# Altium PCB Stove_Light.PcbDoc
Units mm, origin at the board's own origin, x right, y up, seen from the top; angles counter-clockwise.
Board outline 65 x 65 mm, 4 copper layers (Top Signal Layer, Power Layer, Ground Layer, Bottom Signal Layer), stack 0.778 mm thick; 99 components, 64 nets, 316 pads, 223 vias.
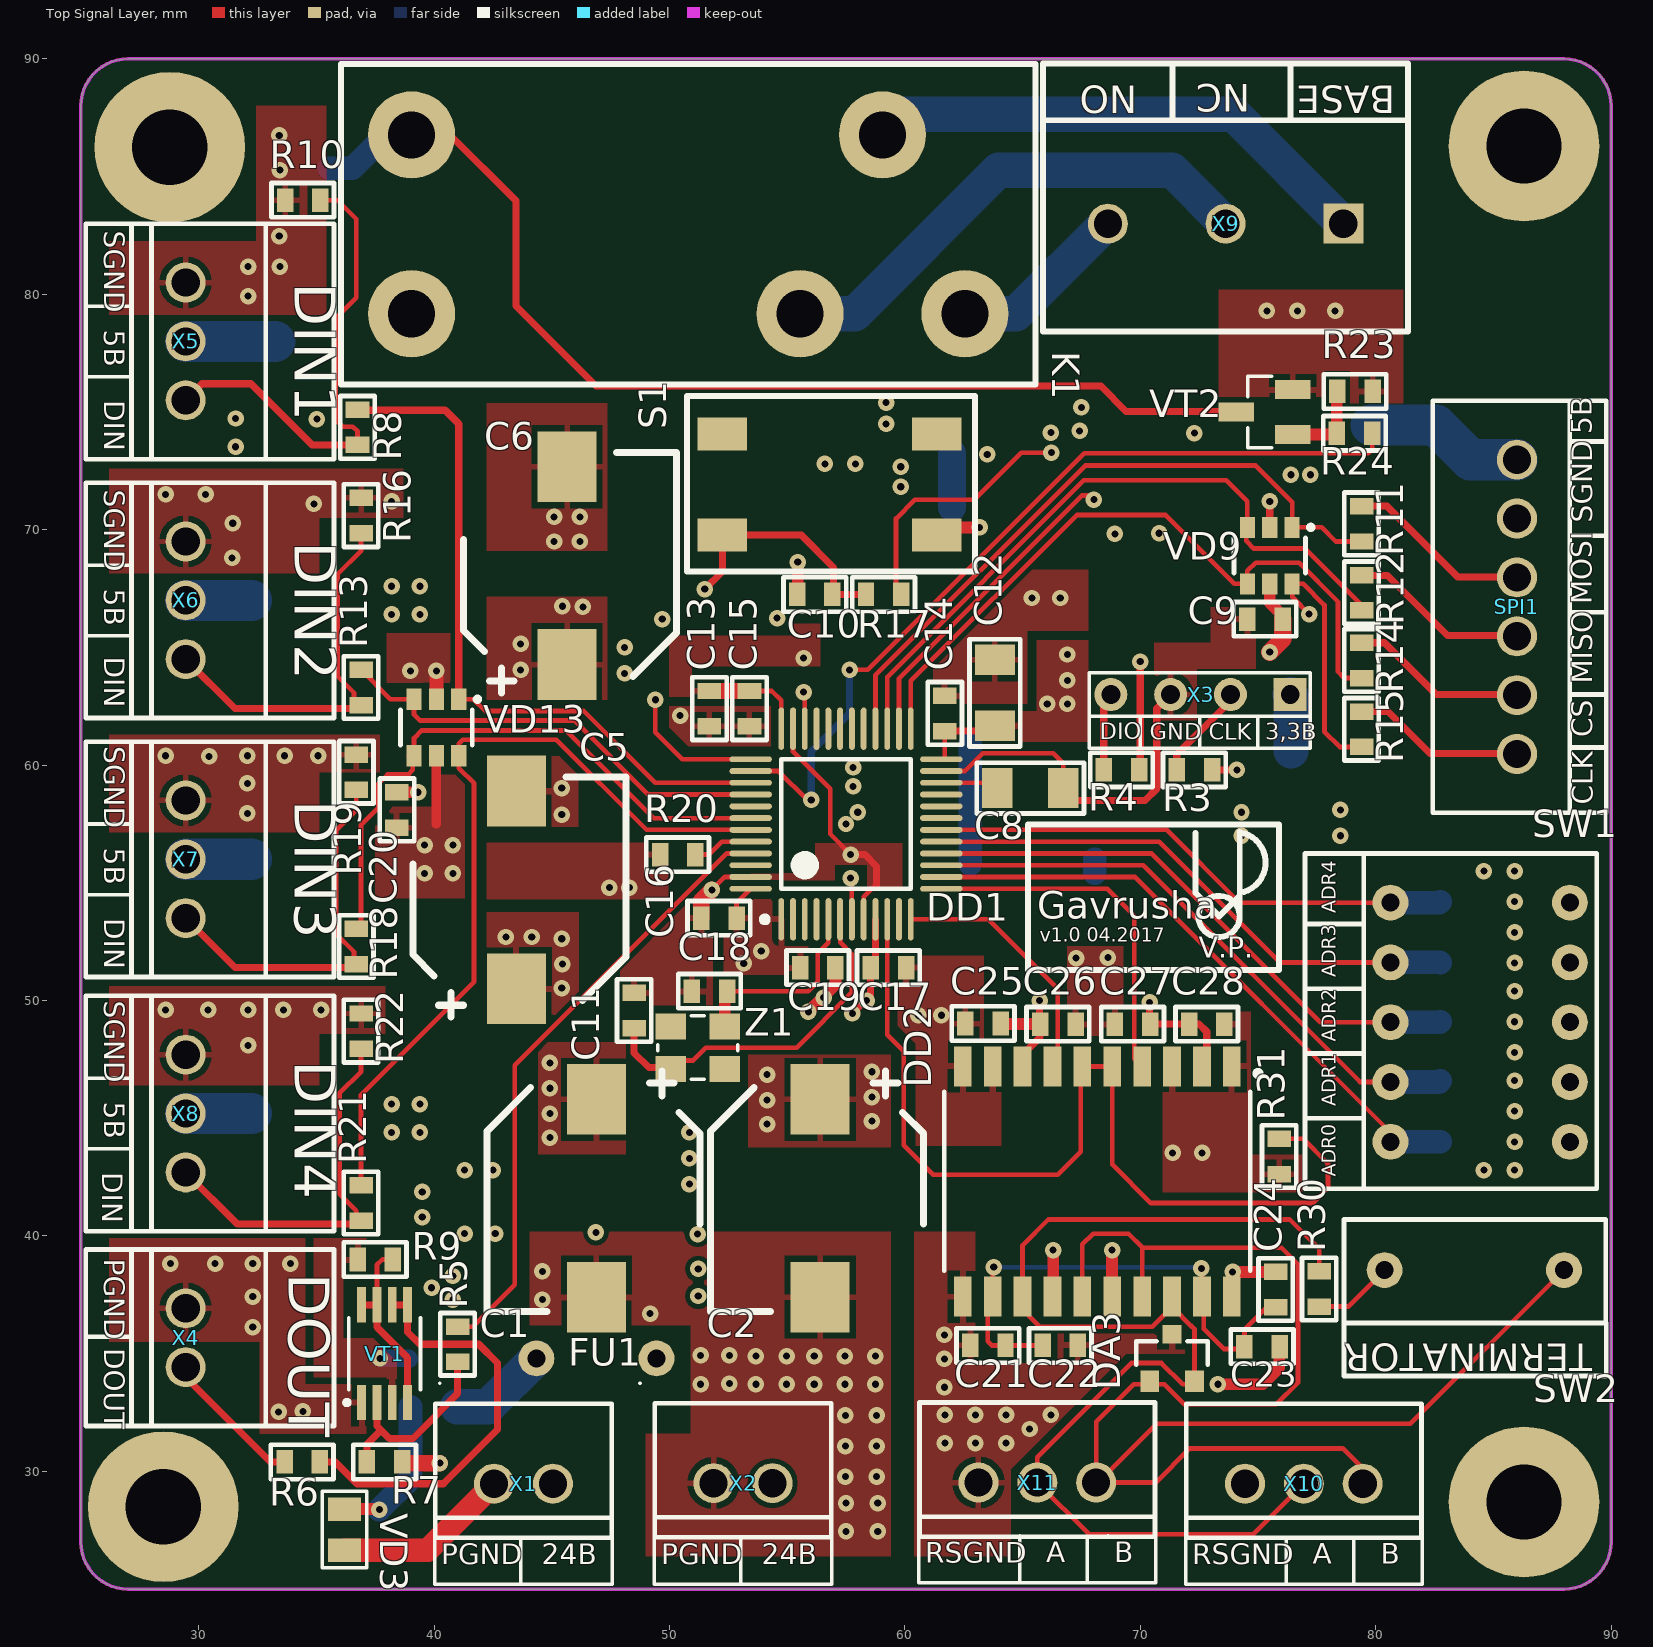
[diagram p0: Top Signal Layer view]
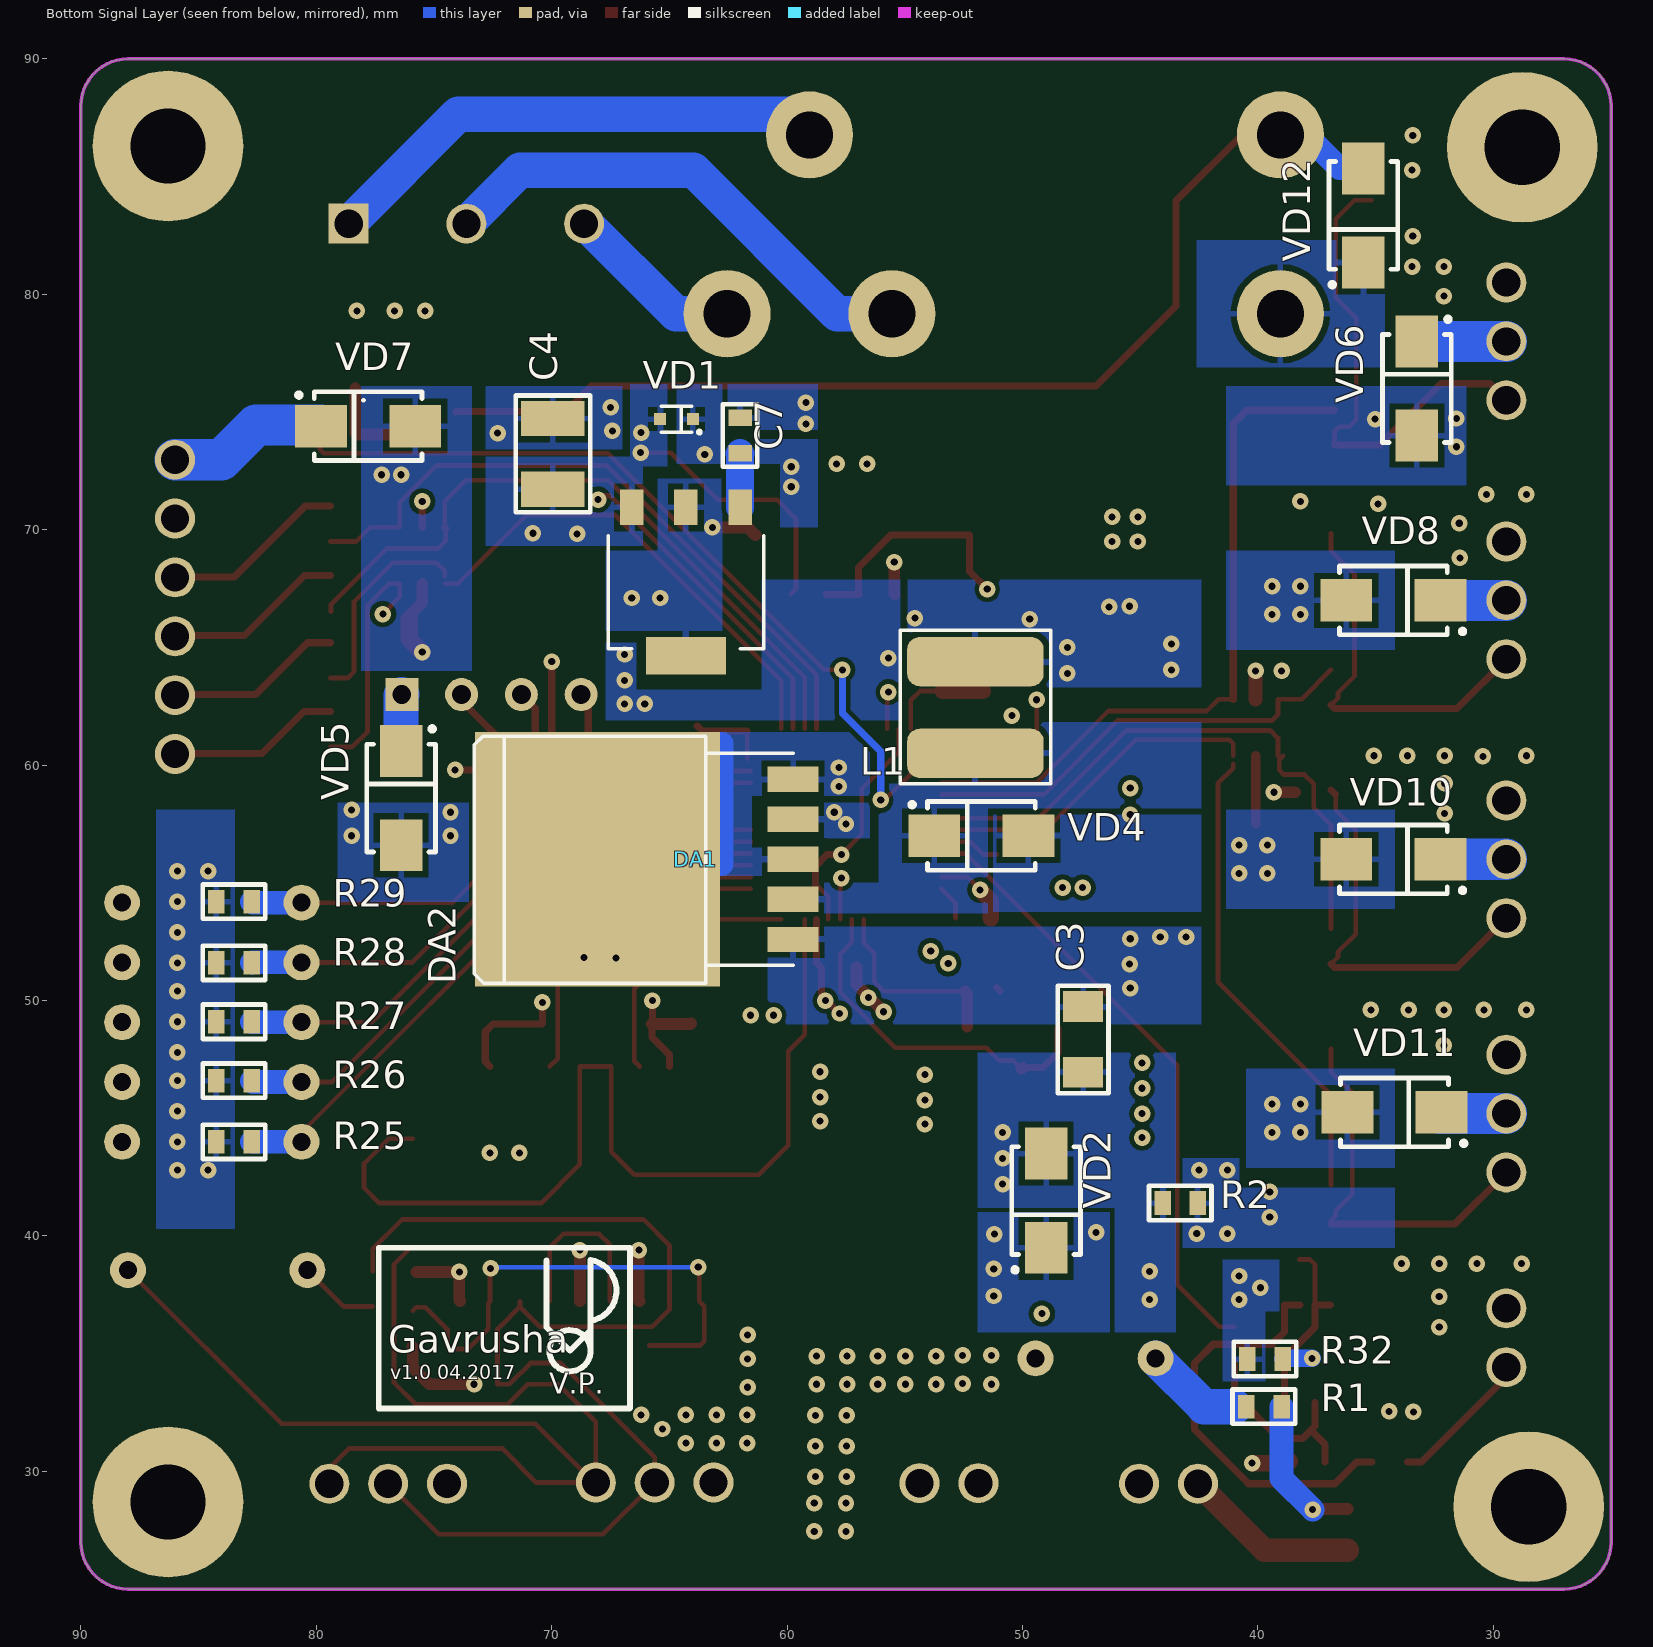
[diagram p1: Bottom Signal Layer view, seen from below]
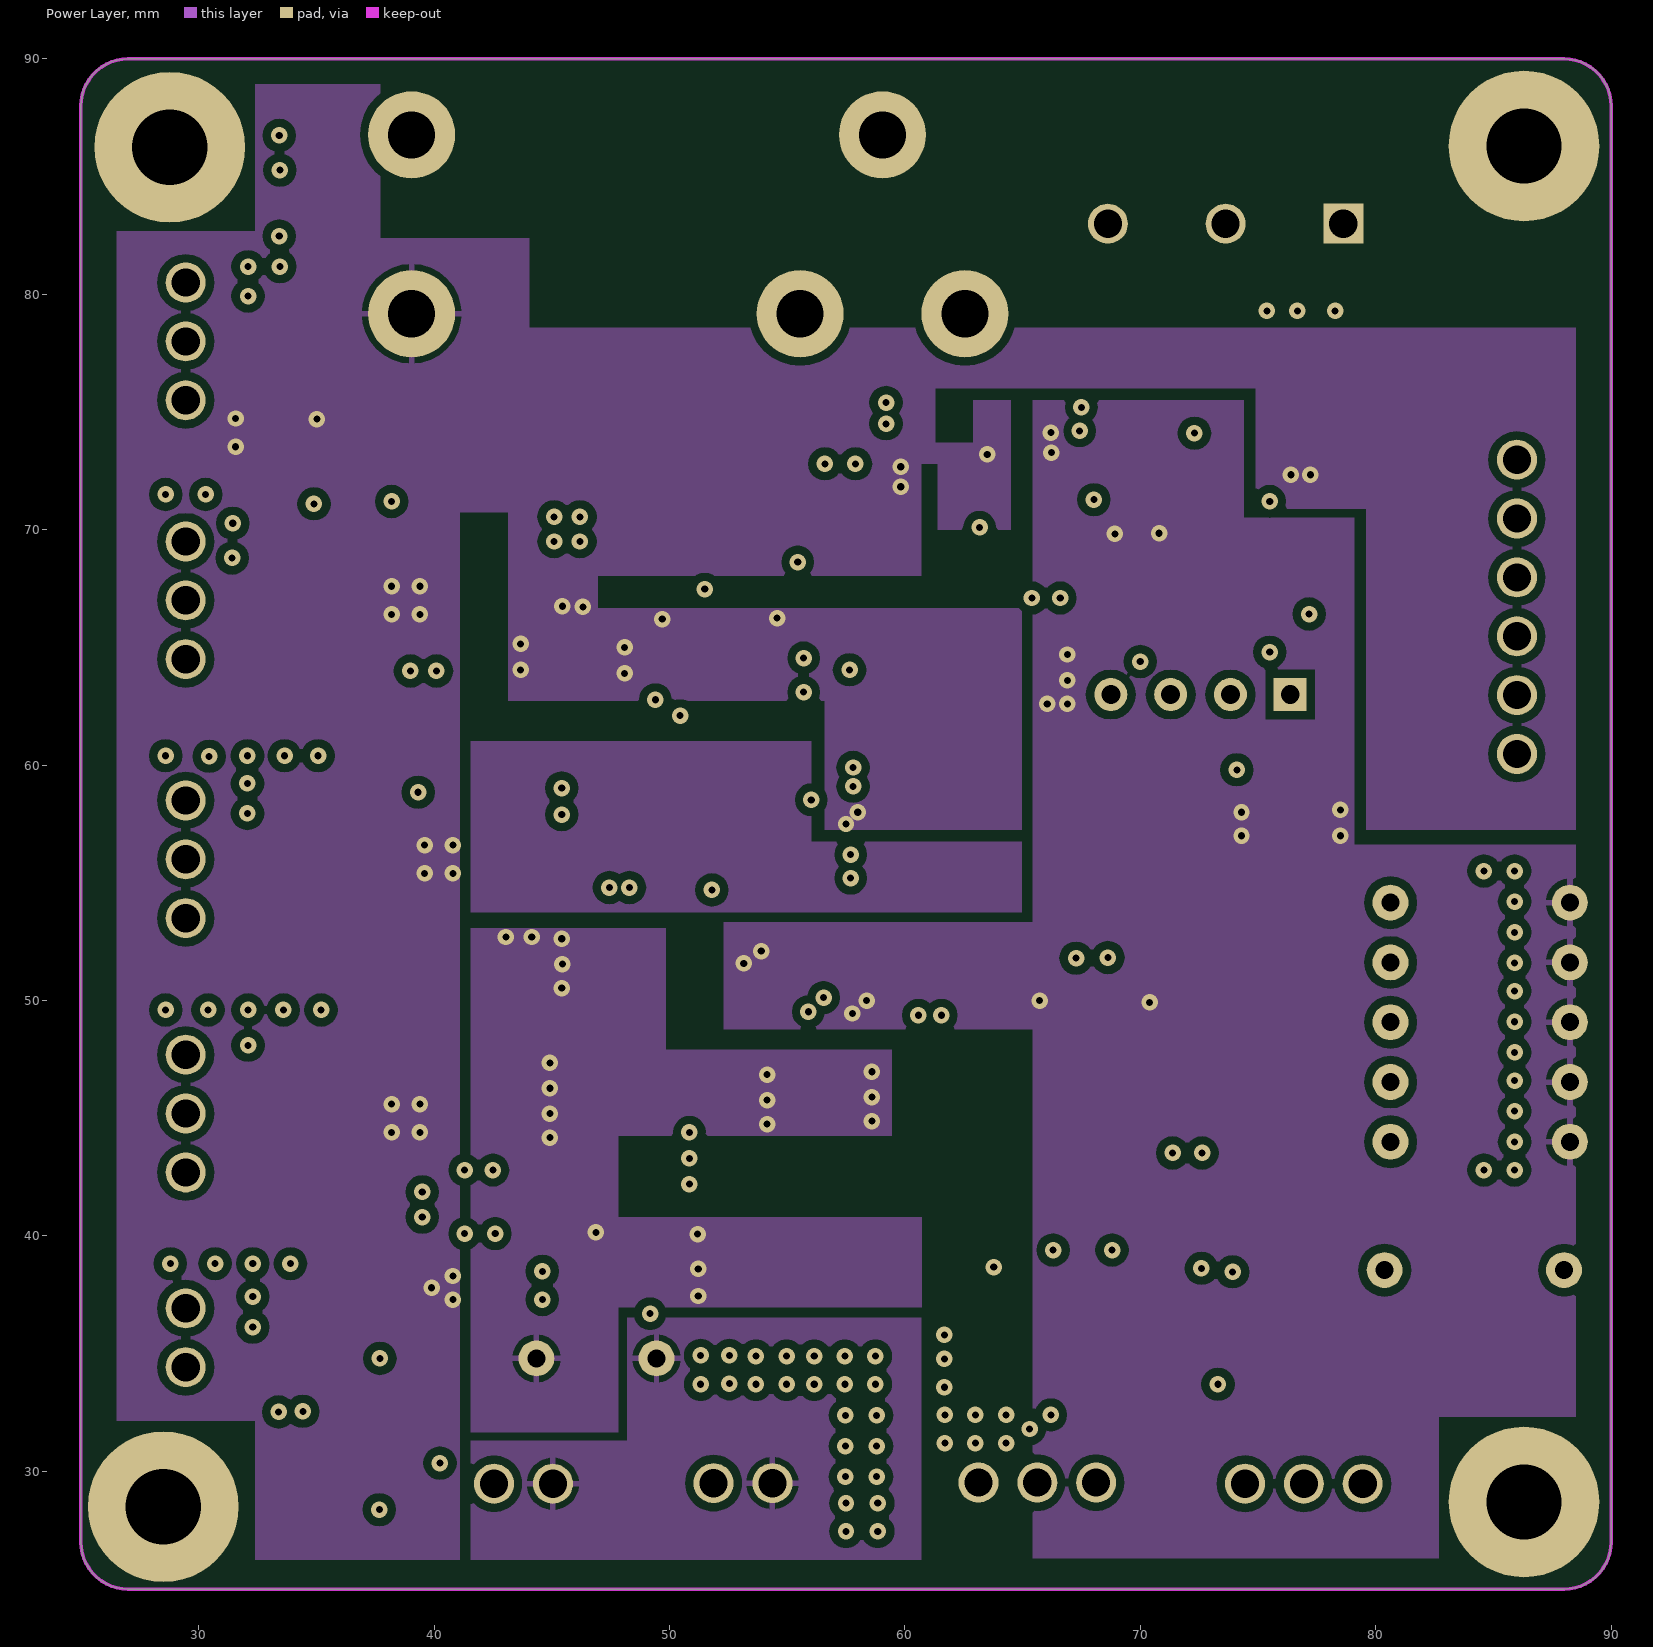
[diagram p2: Power Layer]
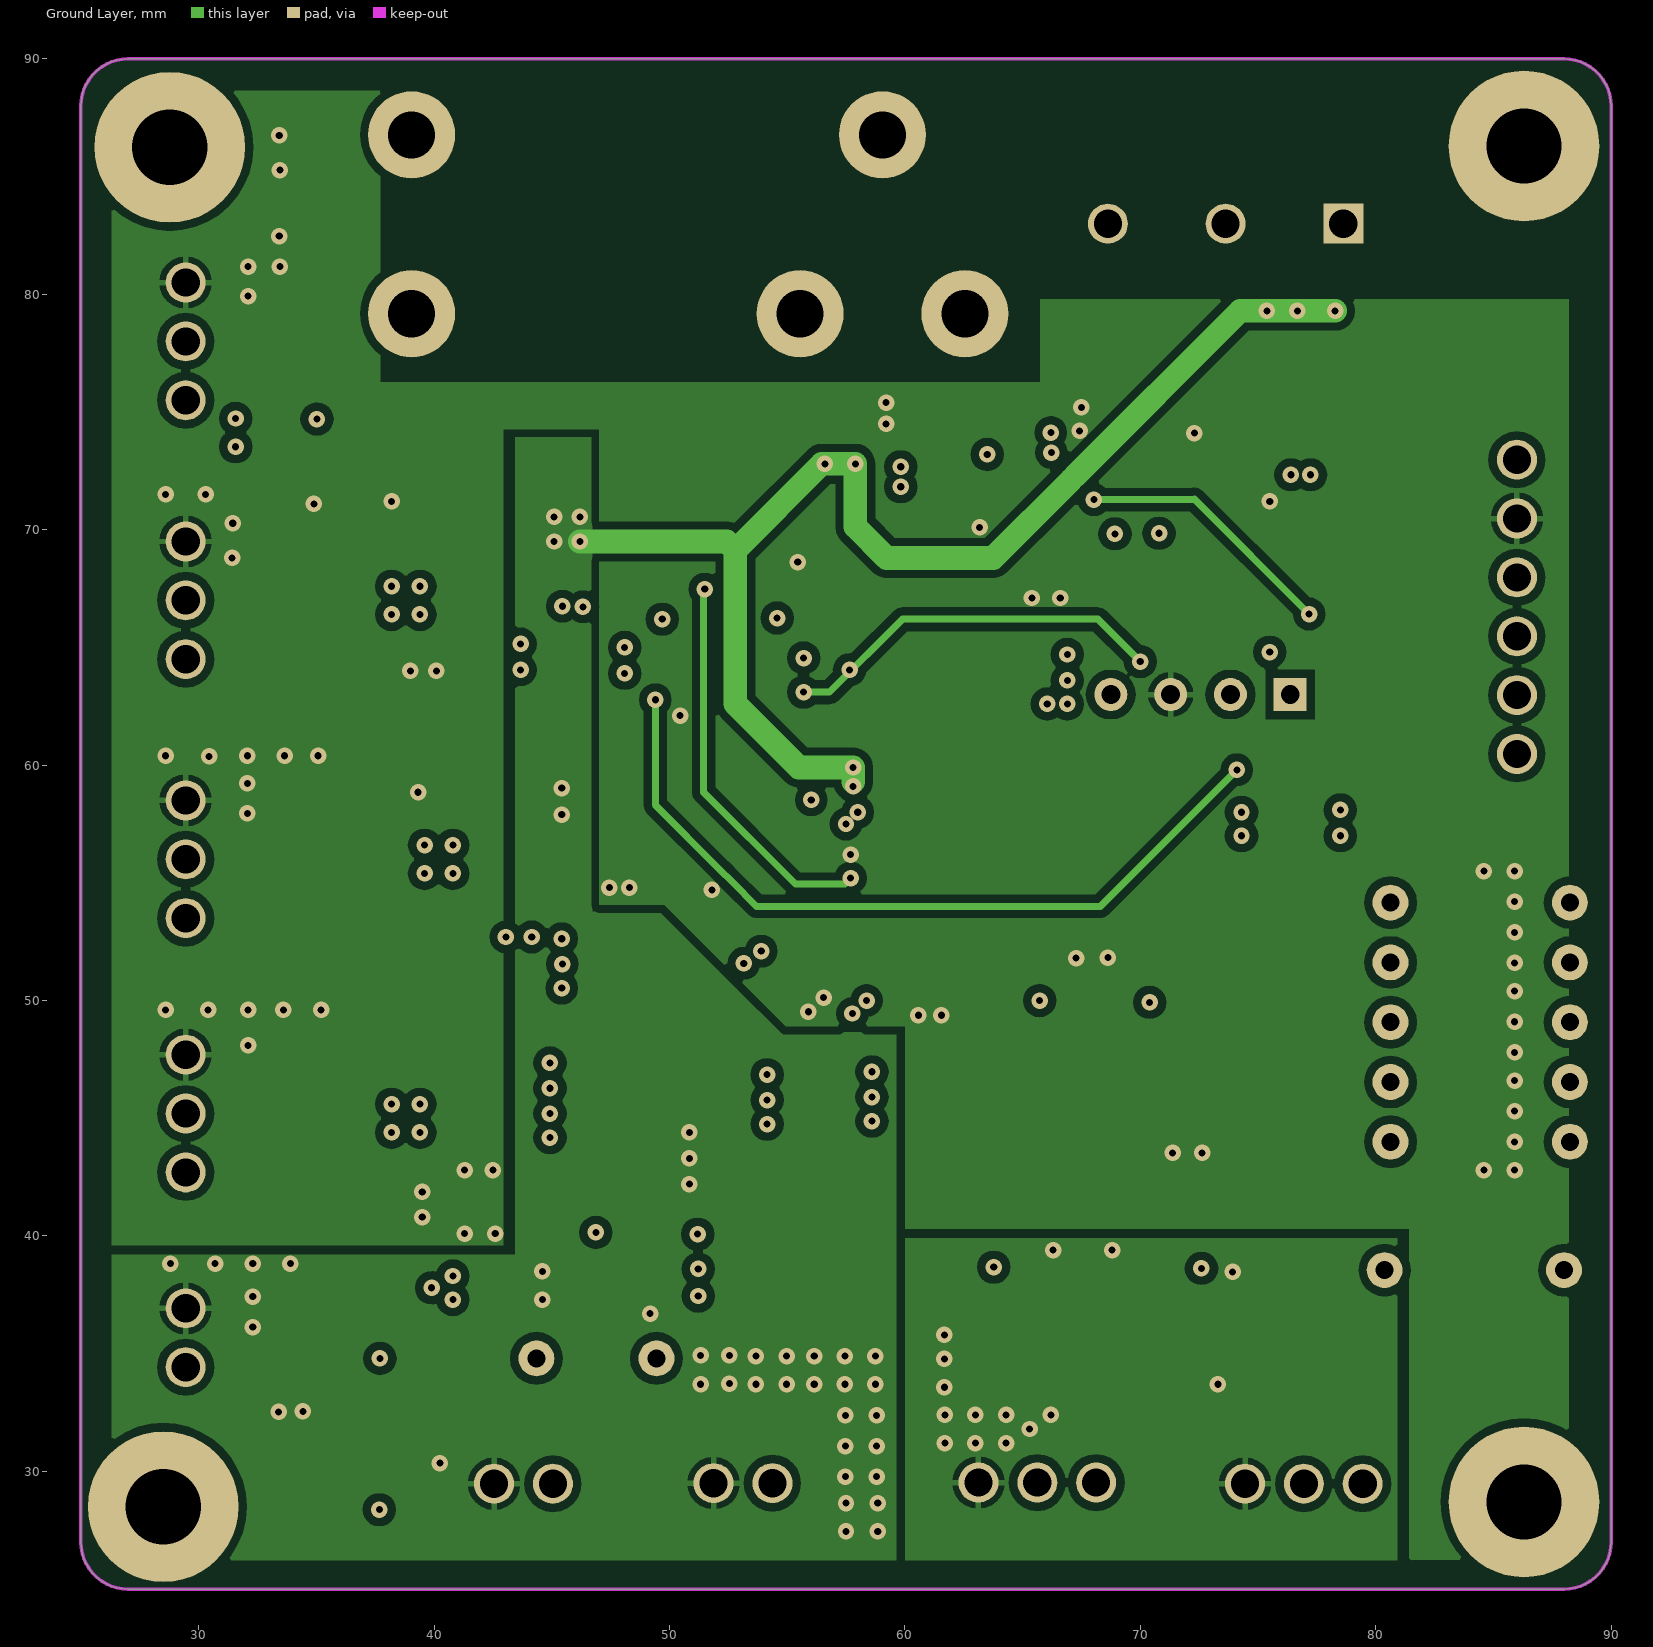
[diagram p3: Ground Layer]
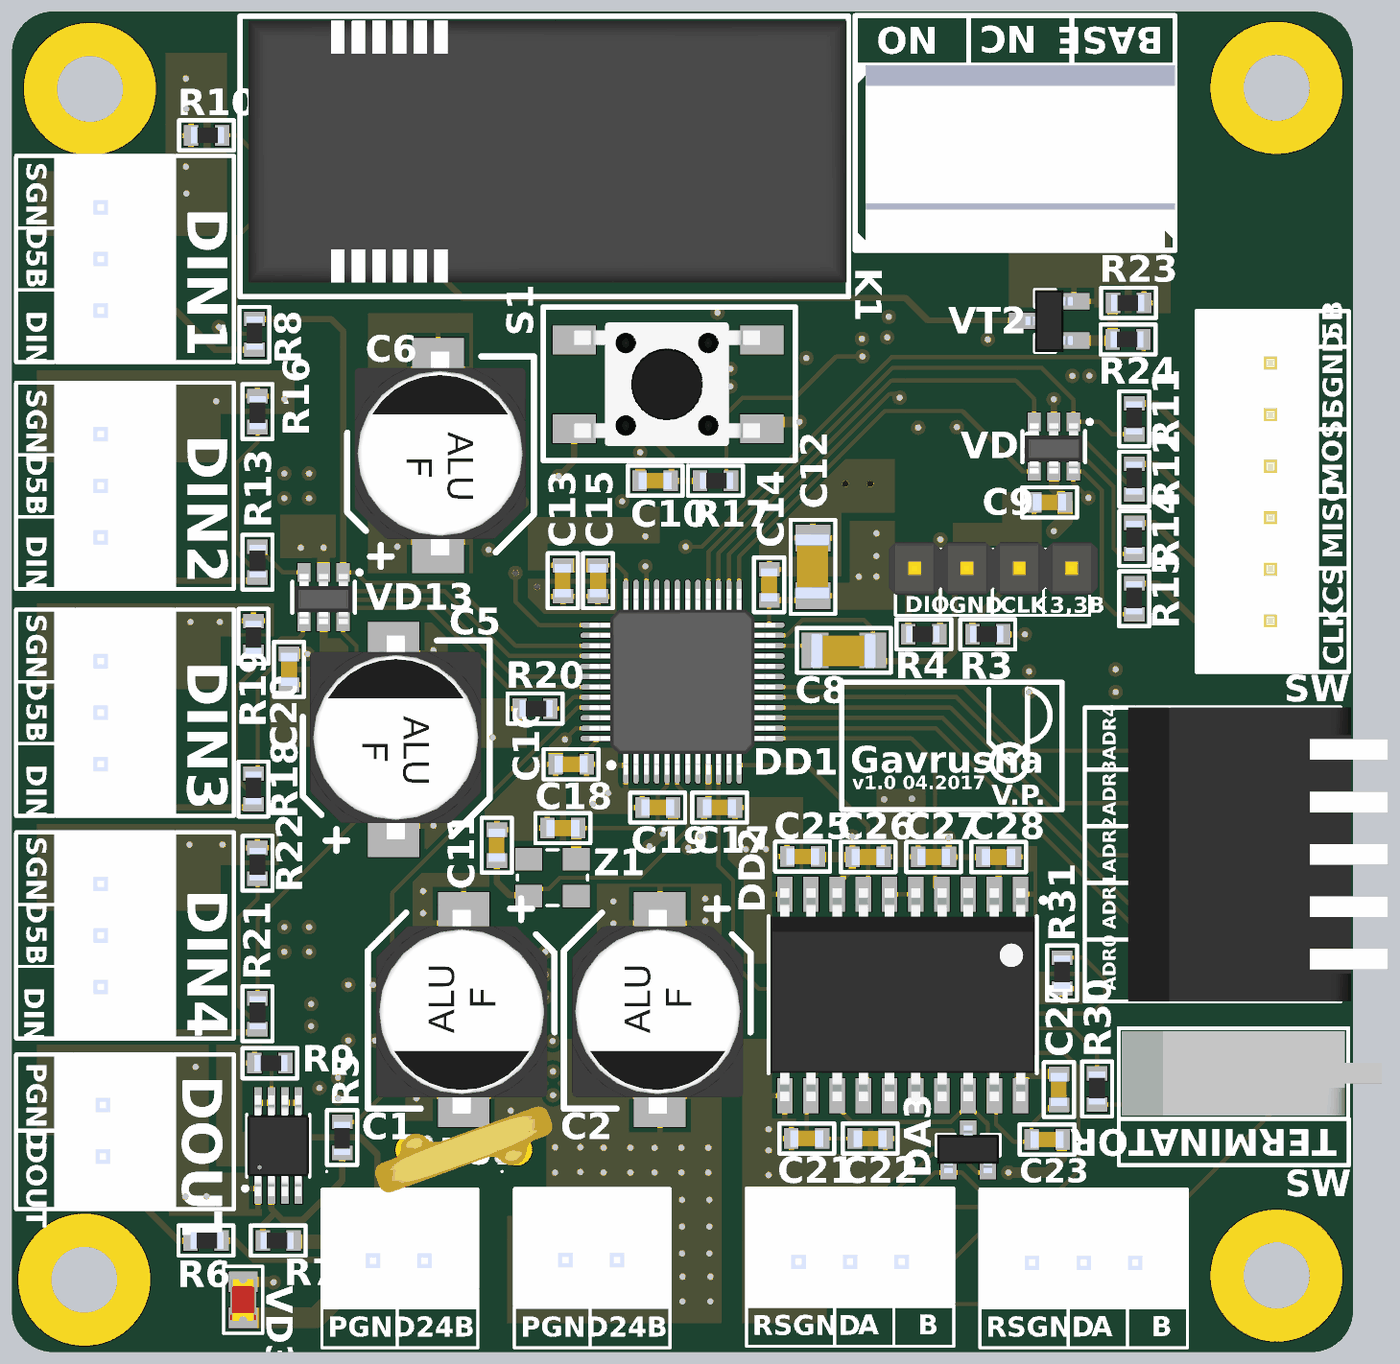
[diagram p4: 3D render of the assembled board from above, using the file's embedded part models]
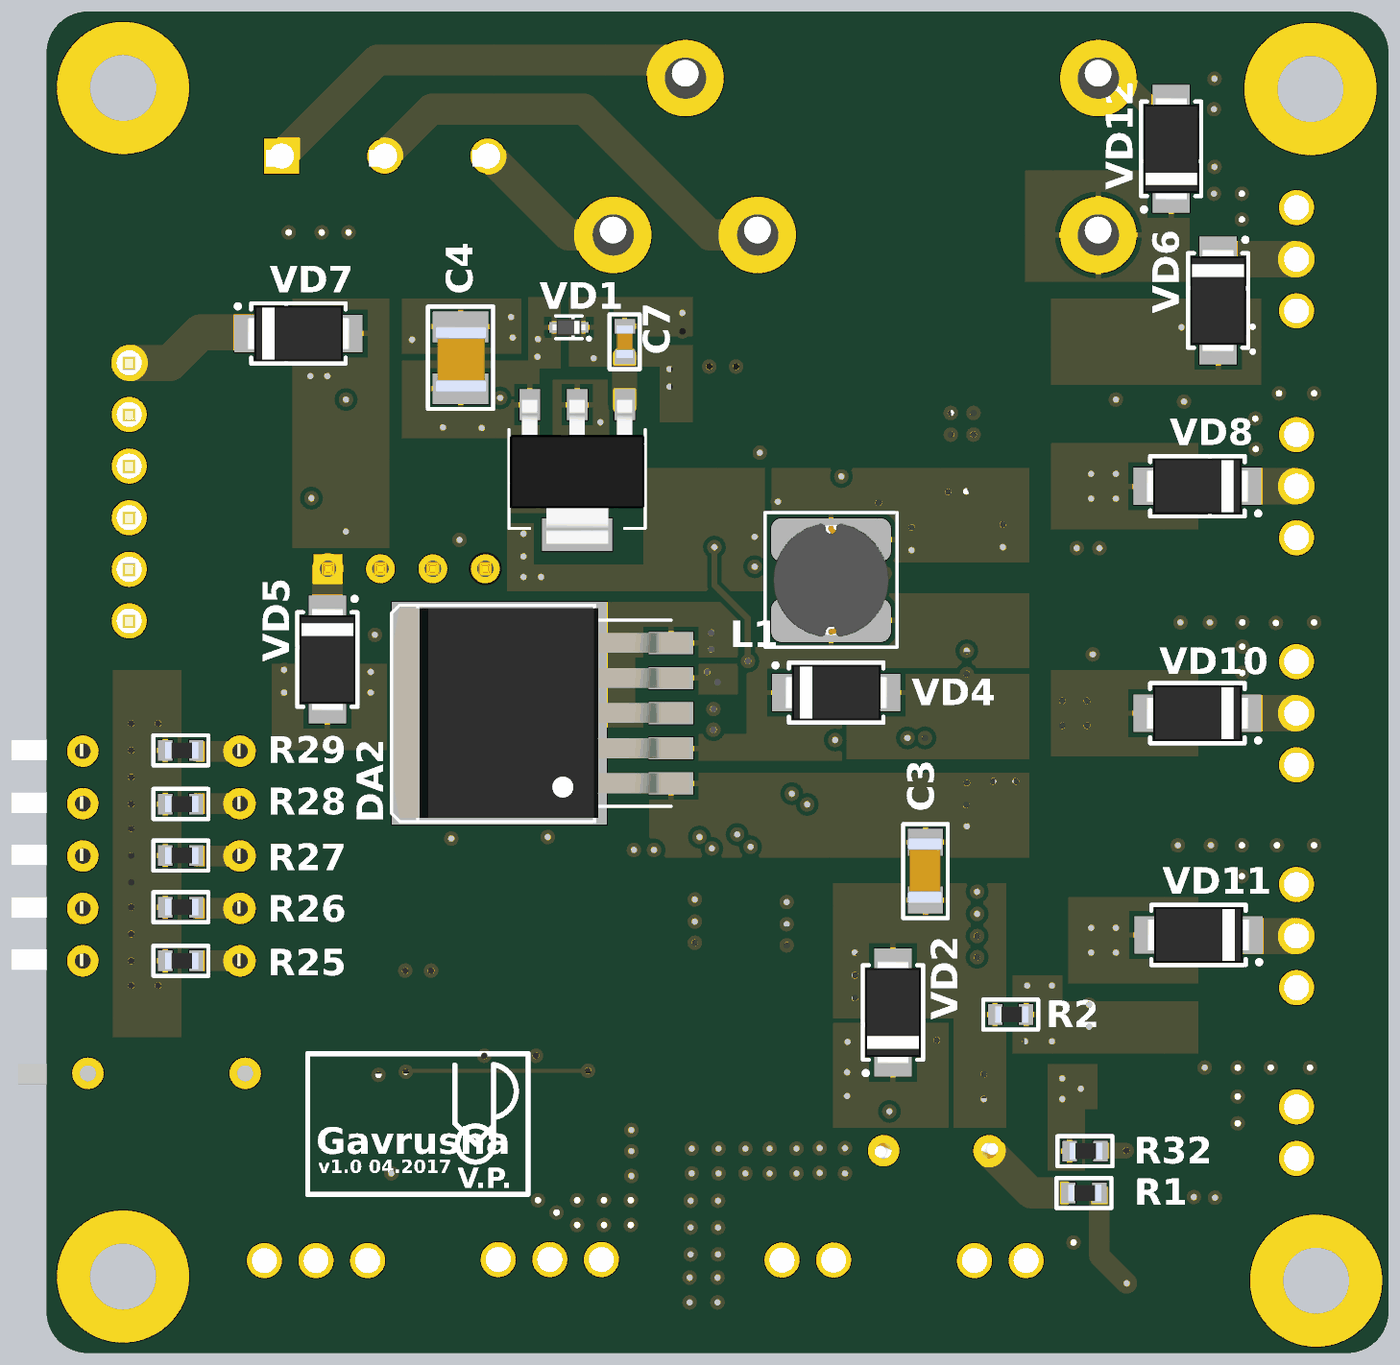
[diagram p5: 3D render of the assembled board from below, using the file's embedded part models]

## Layer stack, top to bottom
Top Solder: solder mask 0.0102, Solder Resist, Dk 3.5
Top Signal Layer: signal copper 0.0356
Dielectric 1: core 0.254, FR-4, Dk 4.2
Power Layer: signal copper 0.036
Dielectric 3: prepreg 0.127, Dk 4.2
Ground Layer: signal copper 0.036
Dielectric 2: core 0.254, Dk 4.2
Bottom Signal Layer: signal copper 0.0356
Bottom Solder: solder mask 0.0102, Solder Resist, Dk 3.5

## Board outline
27,25 cw(c27,27) 25,27 25,88 cw(c27,88) 27,90 88,90 cw(c88,88) 90,88 90,27 cw(c88,27) 88,25

## Design rules (kind name [scope] priority, off if disabled: settings)
Clearance Clearance_tracks_inner [OnLayer('Power Layer') OR OnLayer('Ground Layer')] p1: gap=0.35 // Зазоры между проводниками на внутренних слоях
Clearance Clearance_1 [All] p2: gap=0.2
ComponentClearance [All] p1: gap=0.3 collisioncheckmode=3 verticalgap=0.01 showdistances=FALSE
HoleSize [All] p1: absolutevalues=TRUE maxlimit=10 minlimit=0.3 maxpercent=80.000 minpercent=20.000
MinimumSolderMaskSliver [All] p1: minsoldermaskwidth=0.15
PolygonConnect PolygonConnect_Via [IsVia] p1: connectstyle=Direct reliefconductorwidth=0.254 reliefentries=4 polygonreliefangle="90 Angle" airgapwidth=0.2
PolygonConnect PolygonConnect_1 [All] p2: connectstyle=Relief reliefconductorwidth=0.254 reliefentries=4 polygonreliefangle="90 Angle" airgapwidth=0.254
RoutingVias [All] p1: holewidth=0.711 width=1.27 viastyle="Through Hole" minholewidth=0.711 minwidth=1.27 maxholewidth=0.711 maxwidth=1.27
ShortCircuit [All] p1: allowed=TRUE
SilkToSilkClearance [All] p1: silktosilkclearance=0
SilkToSolderMaskClearance [IsPad] p1: minsilkscreentomaskgap=0 clearancetoexposedcopper=TRUE
SolderMaskExpansion [All] p1: expansion=0.05
Width [All] p1: maxlimit=4 minlimit=0.2 preferedwidth=0.2
Width 3,3В [InNet('3,3В')] p2: maxlimit=2 minlimit=0.2 preferedwidth=1
Width 24В [InNet('24В')] p3: maxlimit=4 minlimit=0.2 preferedwidth=4
Width 5В [InNet('5В')] p4: maxlimit=3 minlimit=0.2 preferedwidth=3
24 further rules are at their usual default settings.

## Components (designator, comment, footprint, x,y, rotation, side; value= is the part's Value field where it differs from the comment)
C1 "220мк" Cap_SMD_radial_polar(10x10.5) 45.9,42.7 r0 top
C2 "220мк" Cap_SMD_radial_polar(10x10.5) 55.4,42.7 r0 top
C3 "2,2мк" C1206 47.45,48.375 r90 bottom
C4 "1мк" C1210 69.75,73.25 r270 bottom
C5 "220мк" Cap_SMD_radial_polar(10x10.5) 44.5,53.6 r180 top
C6 "220мк" Cap_SMD_radial_polar(10x10.5) 46.65,67.375 r180 top
C7 "0,47мк" C0603 62,74 r270 bottom
C8 "2,2мк" C1206 65.3,59 r180 top
C9 "0,1мк" C0603 75.3,66.2 r0 top
C10 "0,1мк" C0603 56.175,67.25 r180 top
C11 "12" C0603 48.5,49.575 r270 top
C12 "10мк" C1206 63.8,63.1 r90 top
C13 "0,1мк" C0603 51.7,62.4 r90 top
C14 "0,1мк" C0603 61.7,62.2 r270 top
C15 "0,1мк" C0603 53.4,62.4 r90 top
C16 "0,1мк" C0603 52.1,53.5 r0 top
C17 "0,1мк" C0603 59.3,51.4 r180 top
C18 "12" C0603 51.7,50.4 r180 top
C19 "0,1мк" C0603 56.3,51.4 r180 top
C20 "0,1мк" C0603 38.425,58.1 r270 top
C21 "10мк" C0603 63.525,35.35 r0 top
C22 "0,1мк" C0603 66.6,35.35 r180 top
C23 "0,1мк" C0603 75.175,35.3 r180 top
C24 "0,1мк" C0603 75.75,37.725 r270 top
C25 "0,1мк" C0603 63.325,49.025 r0 top
C26 "0,1мк" C0603 66.5,49 r180 top
C27 "0,1мк" C0603 69.675,49 r0 top
C28 "10мк" C0603 72.825,49 r180 top
DA1 "LM2596/5.0" TO-263 59.75,56 r90 bottom
DA2 "LM3940" SOT223 64.3,67.8 r0 bottom
DA3 "SM712" SOT23-3 71.35,34.825 r90 top
DD1 "STM32F103CBT6" LQFP48_N 57.5,57.5 r90 top
DD2 "ADM2582EBRWZ" SO20W 68.175,42.325 r270 top
FU1 "RXEF300" F5.1 46.9,34.8 r180 top
K1 "507-1AH-F-C" "EMR 845(H)-1C" 39.05,79.175 r0 top
L1 "47мкГн" SDR0604 52,60.5 r0 bottom
R1 "2,2к" R0603 39.75,32.75 r0 bottom
R2 "0" R0603 43.3,41.4 r0 bottom
R3 "47" R0603 72.3,59.8 r0 top
R4 "47" R0603 69.2,59.8 r0 top
R5 "47" R0603 41,35.4 r90 top
R6 "300" R0603 34.4,30.4 r180 top
R7 "10к" R0603 37.9,30.4 r0 top
R8 "47" R0603 36.75,74.35 r270 top
R9 "10к" R0603 37.5,39 r180 top
R10 "10к" R0603 34.425,84 r180 top
R11 "47" R0603 79.4,70.25 r270 top
R12 "47" R0603 79.4,67.325 r270 top
R13 "47" R0603 36.9,63.3 r270 top
R14 "47" R0603 79.4,64.45 r270 top
R15 "47" R0603 79.4,61.525 r270 top
R16 "10к" R0603 36.9,70.6 r90 top
R17 "47к" R0603 59.1,67.25 r180 top
R18 "47" R0603 36.7,52.3 r270 top
R19 "10к" R0603 36.7,59.7 r90 top
R20 "10к" R0603 50.35,56.2 r180 top
R21 "47" R0603 36.9,41.4 r270 top
R22 "10к" R0603 36.9,48.7 r90 top
R23 "47" R0603 79.1,74.1 r0 top
R24 "10к" R0603 79.125,75.875 r0 top
R25 "47к" R0603 83.5,44 r0 bottom
R26 "47к" R0603 83.5,46.6 r0 bottom
R27 "47к" R0603 83.5,49.1 r0 bottom
R28 "47к" R0603 83.5,51.6 r0 bottom
R29 "47к" R0603 83.5,54.2 r0 bottom
R30 "120" R0603 77.6,37.75 r270 top
R31 "10к" R0603 75.9,43.375 r270 top
R32 "220" R0603 39.7,34.773 r0 bottom
S1 "RESET" BUTTON_SMD 61.35,69.775 r180 top
SPI1 "SPI устройства" CWF-6 86,70.475 r180 top
SW1 "DS1040-05" DIP5_R 88.25,44 r90 top
SW2 "DS1040-01" DIP1_R 88,38.55 r90 top
VD1 "BAS516" SOD523 64.7,74.7 r0 bottom
VD2 "SMAJ24A" SMA 49,41.5 r90 bottom
VD3 "Красный" L_0805 36.2,27.525 r90 top
VD4 "SK34A" SMA 51.75,57 r180 bottom
VD5 "MBR140SFT1G" SMA 76.4,58.6 r270 bottom
VD6 "MBR140SFT1G" SMA 33.25,76 r270 bottom
VD7 "MBR140SFT1G" SMA 77.8,74.4 r180 bottom
VD8 "MBR140SFT1G" SMA 34.25,67 r0 bottom
VD9 "TPD4E001" SOT23-6 75.5,68.9 r270 top
VD10 "MBR140SFT1G" SMA 34.25,56 r0 bottom
VD11 "MBR140SFT1G" SMA 34.2,45.254 r0 bottom
VD12 "SS14" SMA 35.525,83.35 r90 bottom
VD13 "TPD4E001" SOT23-6 40.1,61.6 r270 top
VT1 "IRF7509" Micro8 37.9,35 r90 top
VT2 "IRLML2402" SOT23-3_H 75.275,75 r180 top
X1 "Вход питания №1" CWF-2 45.05,30.025 r90 top
X2 "Вход питания №2" CWF-2 54.375,30.05 r90 top
X3 "Программатор SWD" PLS-4 68.75,63 r270 top
X4 "Цифровой выход" CWF-2 30,34.425 r0 top
X5 "Цифровой вход №1" CWF-3 30,78 r0 top
X6 "Цифровой вход №2" CWF-3 30,67 r0 top
X7 "Цифровой вход №3" CWF-3 30,56 r0 top
X8 "Цифровой вход №4" CWF-3 30,45.2 r0 top
X9 "Реле" DT-128V-3 76.125,83 r180 top
X10 "" CWF-3 76.95,30.025 r90 top
X11 "" CWF-3 65.625,30.075 r90 top
Z1 "12MГц" QSMD3.2x2.5_A 51.2,48 r0 top

## Footprints (in the part's own frame and the unit in brackets; to place one, negate y for a bottom-side part, rotate by r counter-clockwise, add the part's x,y. Pads: shape width x height; smd on the part's side, far side on the other; paste and mask are expansions set on the pad)
BUTTON_SMD [mm] "Кнопка"
  rect 2.1x1.4 smd: 1(0,0) 2(0,-4.3) 3(9.1,0) 4(9.1,-4.3)
  silkscreen extent -1.63,-5.9 10.6,1.55, body extent 0.1,-5.15 9.1,0.85, height 7
C0603 [mm]
  rect 0.7x1 smd: 1(-0.75,0) 2(0.75,0)
  silkscreen extent -1.33,-0.73 1.33,0.73, body extent -0.8,-0.4 0.8,0.4, height 0.9
C1206 [mm]
  rect 1.3x1.7 smd: 1(-1.428,-0.024) 2(1.372,-0.024)
  silkscreen extent -2.31,-1.1 2.25,1.06, body extent -1.6,-0.85 1.6,0.85, height 1.75
C1210 [mm]
  rect 1.5x2.7 smd: 1(-1.475,-0.2) 2(1.525,-0.2)
  silkscreen extent -2.45,-1.78 2.51,1.38, body extent -1.5,-1.42 1.7,1.08, height 1.65
Cap_SMD_radial_polar(10x10.5) [mm] "ECAP SMD, 220 мкФ, 35В"
  rect 2.5x3 smd: 1(1,3.1) 2(1,-5.3)
  silkscreen extent -3.65,-5.9 5.4,4.3, body extent -3.25,-6.15 5.05,3.75, height 10.2
CWF-2 [mm]
  round 1.7 hole 1.2: 1(-0.55,0) 2(-0.55,2.5)
  silkscreen extent -2.85,-2.5 2.85,5, body extent -2.8,-2.45 2.9,5.05, height 7.7
CWF-3 [mm]
  round 1.7 hole 1.2: 1(-0.55,-2.5) 2(-0.55,0) 3(-0.55,2.5)
  silkscreen extent -2.85,-5 2.85,5, body extent -2.9,-5 2.8,5, height 7.7
CWF-6 [mm]
  round 1.7 hole 1.2: 1(0,-2.5) 2(0,0) 3(0,2.5) 4(0,5) 5(0,7.5) 6(0,10)
  silkscreen extent -2.25,-5 3.57,12.5, body extent -2.2,-4.97 3.55,12.53, height 7
DIP1_R [mil]
  round 60 hole 30: 1(0,0) 2(0,300)
  silkscreen extent -89,-70 85,368, body extent -82,-134 79,362, height 402
DIP5_R [mil]
  round 60 hole 30: 1(0,0) 2(100,0) 3(200,0) 4(300,0) 5(400,0) 6(400,300) 7(300,300) 8(200,300) 9(100,300) 10(0,300)
  silkscreen extent -79,-45 482,345, body extent -79,-136 483,360, height 404
DT-128V-3 [mm]
  rect 1.7x1.7 hole 1.2: 1(-2.5,0)
  round 1.7 hole 1.2: 2(2.5,0) 3(7.5,0)
  silkscreen extent -5.25,-4.39 10.25,4.57, body extent -5.25,-4.39 10.25,4.61, height 15.2
"EMR 845(H)-1C" [mm]
  round 3.7 hole 2: 1(16.5,0) 2(23.5,0) 3(20,7.6) 4(0,0) 5(0,7.6)
  silkscreen extent -3,-3 26.5,10.6, body extent -2.59,-2.31 26.41,10.39, height 19
F5.1 [mil]
  round 60 hole 30: 1(-100.39,0) 2(100.39,0)
  body extent -185,-118 186,116, height 608
L_0805 [mm] "SMD LED LAMP"
  rect 1x1.4 smd: 1(-0.875,0) 2(0.875,0)
  silkscreen extent -1.63,-0.95 1.63,0.95, body extent -1.01,-0.63 1.01,0.63, height 1.1
LQFP48_N [mm] "Thin QFP, 48-Leads, Body 7x7mm, Pitch 0.5mm, IPC Medium Density"
  oval 1.8x0.25 smd: 1(-4.05,2.75) 2(-4.05,2.25) 3(-4.05,1.75) 4(-4.05,1.25) 5(-4.05,0.75) 6(-4.05,0.25) 7(-4.05,-0.25) 8(-4.05,-0.75) 9(-4.05,-1.25) 10(-4.05,-1.75) 11(-4.05,-2.25) 12(-4.05,-2.75) 25(4.05,-2.75) 26(4.05,-2.25) 27(4.05,-1.75) 28(4.05,-1.25) 29(4.05,-0.75) 30(4.05,-0.25) 31(4.05,0.25) 32(4.05,0.75) 33(4.05,1.25) 34(4.05,1.75) 35(4.05,2.25) 36(4.05,2.75)
  oval 0.25x1.8 smd: 13(-2.75,-4.05) 14(-2.25,-4.05) 15(-1.75,-4.05) 16(-1.25,-4.05) 17(-0.75,-4.05) 18(-0.25,-4.05) 19(0.25,-4.05) 20(0.75,-4.05) 21(1.25,-4.05) 22(1.75,-4.05) 23(2.25,-4.05) 24(2.75,-4.05) 37(2.75,4.05) 38(2.25,4.05) 39(1.75,4.05) 40(1.25,4.05) 41(0.75,4.05) 42(0.25,4.05) 43(-0.25,4.05) 44(-0.75,4.05) 45(-1.25,4.05) 46(-1.75,4.05) 47(-2.25,4.05) 48(-2.75,4.05)
  silkscreen extent -4.17,-2.75 2.75,3.57, body extent -4.51,-4.51 4.51,4.51, height 1.46
Micro8 [mm]
  rect 1.5x0.38 smd: 1(-2.075,0.975) 2(-2.075,0.325) 3(-2.075,-0.325) 4(-2.075,-0.975) 5(2.075,-0.975) 6(2.075,-0.325) 7(2.075,0.325) 8(2.075,0.975)
  silkscreen extent -2.17,-1.53 1.53,1.7, body extent -2.45,-1.5 2.45,1.5, height 1.15
PLS-4 [mm]
  rect 1.4x1.4 hole 0.8: 1(0,7.62)
  round 1.4 hole 0.8: 2(0,5.08) 3(0,2.54)
  round 1.4 hole 0.8 mask+0.102: 4(0,0)
  silkscreen extent -0.93,-0.92 0.93,8.48, body extent -1.27,-1.27 1.27,8.89, height 9.5
QSMD3.2x2.5_A [mm]
  rect 1.3x1.1 smd: 1(-1.15,-0.9) 2(1.15,0.9) ""(-1.15,0.9) ""(1.15,-0.9)
  silkscreen extent -1.7,-1.35 1.7,1.35, body extent -1.7,-1.35 1.7,1.35, height 1.2
R0603 [mm]
  rect 0.7x1 smd: 1(-0.75,0) 2(0.75,0)
  silkscreen extent -1.33,-0.73 1.33,0.73, body extent -0.85,-0.4 0.75,0.4, height 0.5
SDR0604 [mm] "SMD Power Inductors"
  rrect50% 5.8x2.1 smd: 1(0,0) 2(0,-3.9)
  silkscreen extent -3.2,-5.23 3.2,1.3, body extent -2.8,-4.7 2.8,0.8, height 4.55
SMA [mm]
  rect 2.2x1.8 smd: 1(-2,0) 2(2,0)
  silkscreen extent -3.04,-1.46 2.29,1.46, body extent -2.5,-1.35 2.5,1.35, height 2.15
SO20W [mm]
  rect 1.7x0.75 smd: 1(-4.875,5.715) 2(-4.875,4.445) 3(-4.875,3.175) 4(-4.875,1.905) 5(-4.875,0.635) 6(-4.875,-0.635) 7(-4.875,-1.905) 8(-4.875,-3.175) 9(-4.875,-4.445) 10(-4.875,-5.715) 11(4.9,-5.715) 12(4.9,-4.445) 13(4.9,-3.175) 14(4.9,-1.905) 15(4.9,-0.635) 16(4.9,0.635) 17(4.9,1.905) 18(4.9,3.175) 19(4.9,4.445) 20(4.9,5.715)
  silkscreen extent -4.69,-6.5 3.8,6.93, body extent -5.15,-6.41 5.16,6.41, height 2.48
SOD523 [mm]
  rect 0.5x0.5 smd: 1(-0.7,0) 2(0.7,0)
  silkscreen extent -1.04,-0.55 0.65,0.62, body extent -0.8,-0.4 0.8,0.4, height 0.7
SOT23-3 [mm]
  rect 0.9x0.8 smd: 1(-1,0.95) 2(-1,-0.95)
  rect 0.8x0.8 smd: 3(1,0)
  silkscreen extent -0.3,-1.52 0.7,1.52, body extent -1.15,-1.5 1.15,1.5, height 1.1
SOT23-3_H [mm]
  rect 1.5x0.8 smd: 1(-1.2,0.95) 2(-1.2,-0.95) 3(1.2,0)
  silkscreen extent -0.3,-1.52 0.7,1.52, body extent -1.15,-1.5 1.15,1.5, height 1.1
SOT23-6 [mm]
  rect 0.9x0.64 smd: 1(-1.2,0.95) 2(-1.2,0) 3(-1.2,-0.95) 4(1.2,-0.95) 5(1.2,0) 6(1.2,0.95)
  silkscreen extent -1.3,-1.52 0.75,1.84, body extent -1.13,-1.4 1.3,1.4, height 1.09
SOT223 [mm]
  rect 1x1.5 smd: 1(-2.3,-3.15) 2(0,-3.15) 3(2.3,-3.15)
  rect 3.4x1.6 smd: 4(0,3.15)
  silkscreen extent -3.3,-1.95 3.3,2.85, body extent -3.25,-3.38 3.25,3.58, height 1.67
TO-263 [mm]
  rect 1.07x2.16 smd: 1(-3.4,0) 2(-1.7,0) 3(0,0) 4(1.7,0) 5(3.4,0)
  rect 10.8x10.41 smd: 6(0,8.315)
  silkscreen extent -5.26,0 5.23,13.54, body extent -5.08,-0.9 5.1,13.45, height 4.58

## Part data
C1 C2: library part Capacitor_pol, "Конденсатор поляризованный"
C3 C4 C7 C8 C9 C10 C11 C13 C14 C15 C16 C17 C18 C19 C20 C21 C22 C23 C24 C25 C26 C27 C28: library part Capacitor, "Конденсатор"
C5 C6: library part Capacitor_pol, "Конденсатор полярный"
C12: library part Capacitor_pol, "Конденсатор танталовый"
DA1: library part LM2596, "3-A Step-Down Voltage Regulator"
DA2: "Low-Dropout Regulator for 5-V to 3.3-V Conversion"
DA3: "SM712.TCT, Диод защитный для устройсв стандарта RS-485, 400Вт, 12В, [SOT-23]"
DD1: library part STM32F104Cx
DD2: library part ADM2587EBRWZ, "Приемопередатчик RS485 изолированный"
FU1: library part Fuse, "RXEF300 (RXE300), 3 А, Предохранитель самовосстанавливающийся, PolySwitch"
K1: library part 845(H)-1C, "Электромагнитное реле"
L1: library part Inductor, "Катушка индуктивности"
R1 R2 R3 R4: library part Resistor_0,125Вт, "Резистор"
R5 R6 R7 R8 R11 R12 R13 R14 R15 R18 R21 R23 R32: library part Resistor_0,125Вт, "0.125Вт 0805 47 Ом, 1%, Чип резистор (SMD)"
R9 R10 R16 R17 R19 R20 R22 R24 R25 R26 R27 R28 R29 R30 R31: library part Resistor_0,125Вт, "0.125Вт 0805 10 кОм, 1%, Чип резистор (SMD)"
S1: library part Button_SMD, "Кнопка"
SPI1: library part Header_6_sct, "Разъем - 5 конт. розетка"
SW1 SW2: "DIP переключатель"
VD1: library part Diode, "Диод"
VD2: library part DiodeZener, "Стабилитрон"
VD3: library part LED_L, "Светодиод_красный"
VD4 VD5 VD6 VD7 VD8 VD10 VD11 VD12: library part DiodeSchottky, "Диод Шоттки"
VD9 VD13: "Диодная сборка"
VT1: "Комплементарная сборка МОП"
VT2: "MOSFET"
X1 X2 X4: library part Header_2_sct, "Разъем - 2 конт. розетка"
X3: library part Header_4_plg, "Разъем - 4 конт. вилка"
X5 X6 X7 X8 X10 X11: library part Header_3_sct, "Разъем - 2 конт. розетка"
X9: library part Header_3_trm, "Разъем - 3 конт. клемма"
Z1: library part Crystal, "Кварцевый резонатор"

## Free pads (board coordinates)
  round 6.4 hole 3.2: 2(28.5,28.5) 2(28.775,86.25) 2(86.3,28.7) 2(86.3,86.3)

## Via types
v1: diameter 0.7, hole 0.3, Top Signal Layer to Bottom Signal Layer, tented both sides, 223 vias

## Nets (pads, with @x,y where several pads share a name; then routed paths per layer and width w, separated by ;. In a path a pad name is that pad's centre, name@x,y a point inside that pad or via, vN(x,y) a via of type N, cw(c..) or ccw(c..) an arc to the next point about the centre after c; other vN are vias at no path point)
3,3В: C4.2 C12.1 C13.2 C14.2 C15.2 C16.2 C17.2 C19.2 C25.2 C26.2 C27.2 C28.2 DA2.3 DD1.1 DD1.9 DD1.24 DD1.36 DD1.48 DD2.2 DD2.8 R17.1 SW1.1 SW1.2 SW1.3 SW1.4 SW1.5 VD1.2 VD5.2 | length 34.6
  Top Signal Layer w0.2: C16.2 52.85,54.15 DD1.48 ; C15.2 54.35,63.15 54.75,62.75 DD1.36 ; R17.1 59.625,67.475 59.625,70.475 60.425,71.275 62.95,71.275 64.95,73.275 v1(66.225,73.275) ; DD1.24@61.7,60.275 C14.2
  Top Signal Layer w0.3: v1(57.775,49.45) 58.55,50.225 C17.2 58.75,51.6 DD1.9 ; C14.2 63.602,61.45 C12.1 ; DD2.8 65,47.7 65.75,48.45 C26.2 65.725,49.025 v1(65.725,50) ; v1(70.4,49.925) 70.4,49.025 C27.2 C28.2 72.5,49 72.825,48.675 72.825,47.405 DD2.2
  Top Signal Layer w0.5: C25.2 64.1,49 C26.2
  Top Signal Layer w0.7: C13.2 C15.2
  other v1: 58.375,50 53.157,51.582 53.9,52.1 74.3,57 78.5,57 74.3,58 78.5,58.1 66.05,62.6 66.9,62.6 66.9,63.6 55.7,64.55 66.9,64.7 68.925,69.825 70.8,69.85 66.2,74.127
5В: C6.1 C7.2 C9.2 C20.2 DA1.4 DA2.1 K1.4 L1.2 R32.2 VD1.1 VD6.2 VD7.2 VD8.2 VD9.5 VD10.2 VD11.2 VD12.1 VD13.5 | length 8.3
  Top Signal Layer w0.4: 40.1,57.5 VD13.5
  Top Signal Layer w0.5: VD9.5 75.5,66.9 C9.2@75.975,66.425
  Top Signal Layer w0.75: v1(75.5,64.8) 76.05,65.35 C9.2
  Bottom Signal Layer w1.2: DA2.1 C7.2
  other v1: 40.8,37.3 39.9,37.8 40.8,38.3 38.2,44.4 39.4,44.4 38.2,45.6 39.4,45.6 39.6,55.4 40.8,55.4 39.6,56.6 40.8,56.6 57.5,57.5 58,58 48.1,63.9 43.675,64.05 48.1,65 43.675,65.15 49.694,66.2 54.575,66.25 38.2,66.4 39.4,66.4 46.325,66.725 45.45,66.75 38.2,67.6 39.4,67.6 59.825,71.825 76.402,72.336 77.227,72.336 59.825,72.675 63.5,73.2 31.575,73.525 35.025,74.7 31.575,74.725
24В: C1.1 C2.1 C3.2 C5.1 DA1.1 FU1.2 R1.2 VD2.1 | length 4.2
  Bottom Signal Layer w1.5: 41,32.75 42.3,32.75 FU1.2
  other v1: 51.225,37.45 51.225,38.6 51.2,40.075 46.875,40.15 44.925,44.175 54.15,44.75 58.6,44.875 44.925,45.2 54.15,45.775 58.6,45.9 44.925,46.275 54.15,46.85 58.6,46.975 44.925,47.35 45.425,50.525 45.45,51.55 45.425,52.625 43.05,52.7 44.15,52.7
DOUT: DD1.45 R5.2 | length 26.2
  Top Signal Layer w0.2: R5.2 41.65,36.15 43.425,37.925 43.425,47.244 52.431,56.25 DD1.45
MCU_ADR_0: DD1.14 R25.1 SW1.10 | length 26.1
  Top Signal Layer w0.2: DD1.14 69.775,55.25 80.63,44.395 SW1.10
  Bottom Signal Layer w1: SW1.10 R25.1
MCU_ADR_1: DD1.15 R26.1 SW1.9 | length 25
  Top Signal Layer w0.2: DD1.15 70.125,55.75 79.335,46.54 SW1.9
  Bottom Signal Layer w1: SW1.9 82.69,46.54 R26.1
MCU_ADR_2: DD1.16 R27.1 SW1.8 | length 24.2
  Top Signal Layer w0.2: DD1.16 70.475,56.25 77.645,49.08 SW1.8
  Bottom Signal Layer w1: SW1.8 82.73,49.08 R27.1
MCU_ADR_3: DD1.17 R28.1 SW1.7 | length 23.3
  Top Signal Layer w0.2: DD1.17 70.8,56.75 75.93,51.62 SW1.7
  Bottom Signal Layer w1: SW1.7 82.73,51.62 R28.1
MCU_ADR_4: DD1.18 R29.1 SW1.6 | length 22.6
  Top Signal Layer w0.2: DD1.18 71.125,57.25 74.215,54.16 SW1.6
  Bottom Signal Layer w1: SW1.6@80.67,54.2 SW1.6 82.71,54.16 R29.1
MCU_DIN1: DD1.39 R8.1 VD13.1 | length 30.1
  Top Signal Layer w0.2: VD13.1 41.675,62.8 42.175,62.3 46.35,62.3 49.4,59.25 DD1.39
  Top Signal Layer w0.3: R8.1@36.75,75.075 40.475,75.075 41.05,74.5 VD13.1
MCU_DIN2: DD1.40 R13.1 VD13.3 | length 19.1
  Top Signal Layer w0.2: R13.1 38.15,62.8 VD13.3 39.15,62.15 39.4,61.9 45.95,61.9 49.1,58.75 DD1.40
MCU_DIN3: DD1.42 R18.1 VD13.4 | length 25.6
  Top Signal Layer w0.2: R18.1@36.9,53.05 36.9,57.464 37.625,58.189 37.625,59.2 38.025,59.6 38.9,59.6 39.1,59.8 39.1,60.225 VD13.4@38.925,60.4 ; VD13.4 39.15,61.15 39.475,61.475 45.6,61.475 49.325,57.75 DD1.42
MCU_DIN4: DD1.43 R21.1 VD13.6 | length 34.7
  Top Signal Layer w0.2: R21.1 36.9,46 41.7,50.8 41.7,59.224 41.05,59.874 VD13.6@41.05,60.05 ; VD13.6 41.05,60.9 41.225,61.075 45.2,61.075 49.025,57.25 DD1.43
MCU_SPI2_CLK: DD1.26 R15.2 VD9.6 | length 35.4
  Top Signal Layer w0.2: DD1.26 59.75,63.678 67.522,71.45 67.857,71.45 v1(68.028,71.278) ; v1(77.175,66.42) 76.45,67.145 VD9.6 76.925,67.7 77.825,66.8 77.825,61.425 78.475,60.775 R15.2
  Ground Layer w0.3: v1(68.028,71.278) 72.273,71.278 72.295,71.3 v1(77.175,66.42)
MCU_SPI2_CS: DD1.25 R14.2 VD9.4 | length 29.5
  Top Signal Layer w0.2: DD1.25 60.25,63.575 67.3,70.625 71.075,70.625 74,67.7 VD9.4 ; VD9.4@74.55,68.015 74.55,68.25 74.9,68.6 76.744,68.6 78.4,66.944 78.4,63.975 78.675,63.7 R14.2
MCU_SPI2_MISO: DD1.27 R12.2 VD9.3 | length 29.3
  Top Signal Layer w0.2: DD1.27 59.25,63.744 67.606,72.1 73.65,72.1 74.55,71.2 VD9.3 ; VD9.3@74.5,70.05 74.5,69.525 74.825,69.2 77,69.2 79.375,66.825 R12.2@79.375,66.525
  Top Signal Layer w0.3: VD9.3@74.5,70.05 VD9.3
MCU_SPI2_MOSI: DD1.28 R11.2 VD9.1 | length 28.6
  Top Signal Layer w0.2: DD1.28 58.75,63.809 67.666,72.725 74.9,72.725 76.45,71.175 VD9.1 77.7,70.1 78.3,69.5 R11.2
MCU_SWITCH_EMR1: DD1.38 R23.2 | length 36.1
  Top Signal Layer w0.2: DD1.38 54.625,59.75 v1@55.85,58.525 ; v1(57.652,64.048) 58.423,64.048 67.625,73.25 79.675,73.25 79.85,73.425 R23.2@79.85,74.125
  Top Signal Layer w0.3: v1@55.85,58.525 v1(56.025,58.525)
  Bottom Signal Layer w0.3: v1(56.025,58.525) 56.025,60.575 57.652,62.202 v1(57.652,64.048)
MCU_USART2_REDE: DD1.10 DD2.5 DD2.6 R31.1 | length 41
  Top Signal Layer w0.2: DD1.10 59.25,48.55 59.95,47.85 59.95,43.85 61.2,42.6 66.5,42.6 67.475,43.575 DD2.6@67.475,47.2 ; DD2.6 DD2.5 68.81,43.04 70.45,41.4 77.325,41.4 77.975,42.05 77.975,43.075 76.925,44.125 R31.1
MCU_USART2_RX: DD1.13 DD2.4 | length 15.2
  Top Signal Layer w0.2: DD1.13 68.6,54.75 69.75,53.6 69.75,47.53 DD2.4
MCU_USART2_TX: DD1.12 DD2.7 | length 10.9
  Top Signal Layer w0.2: DD1.12 63.55,53.45 66.5,50.5 66.5,47.43 DD2.7
NetC8_2: C8.2 DD1.22 | length 2.2
  Top Signal Layer w0.2: DD1.22 C8.2@63.454,59.25
  Top Signal Layer w0.3: C8.2@63.454,59.25 C8.2@63.628,59.424
NetC10_1: C10.1 DD1.7 R17.2 S1.3 | length 28.9
  Top Signal Layer w0.2: DD1.7 v1@57.75,55.15
  Top Signal Layer w0.3: v1(51.5,67.475) 52.25,68.225 S1.3 55.6,69.775 56.975,68.4 56.975,67.3 C10.1 R17.2 ; v1(57.7,55.2) v1@57.75,55.15
  Ground Layer w0.3: v1(51.5,67.475) 51.45,67.425 51.45,58.85 55.35,54.95 57.45,54.95 v1(57.7,55.2)
NetC11_2: C11.2 DD1.6 Z1.1 | length 15.2
  Top Signal Layer w0.2: Z1.1 50.4,47.45 51,47.45 51.55,48 55.4,48 57.75,50.35 57.75,51.975 57.25,52.475 DD1.6
  Top Signal Layer w0.3: C11.2 48.5,47.775 49.125,47.15 Z1.1@50,47.15
  Top Signal Layer w0.5: Z1.1@50,47.15 Z1.1
NetC18_1: C18.1 DD1.5 Z1.2 | length 8.4
  Top Signal Layer w0.2: C18.1 55.9,50.4 56.3,50.8 56.3,52 56.75,52.45 DD1.5
  Top Signal Layer w0.5: Z1.2 52.35,50.3 C18.1
NetC21_2: C21.2 C22.2 C23.2 C24.2 DD2.12 DD2.19 | length 21.9
  Top Signal Layer w0.2: v1(63.775,38.675) 63.73,38.63 63.73,37.225 63.525,37.02 63.525,35.525 63.7,35.35 C21.2 C22.2 ; v1(72.6,38.625) 72.62,38.605 72.62,37.225 72.7,37.145 72.7,36.05 73.55,35.2 74.325,35.2 C23.2 74.425,36.025 75.375,36.975 C24.2 C24.2@75.9,36.825
  Bottom Signal Layer w0.2: v1(63.775,38.675) 72.55,38.675 v1(72.6,38.625)
NetDA1_2: DA1.2 L1.1 VD4.1
NetDD1_44: DD1.44 R20.1 | length 2.6
  Top Signal Layer w0.2: R20.1 51.675,56.2 52.225,56.75 DD1.44
NetFU1_1: FU1.1 X1.1 X2.1
NetK1_1: K1.1 X9.2 | length 21.5
  Bottom Signal Layer w1.5: K1.1 57.875,79.175 63.975,85.275 71.35,85.275 X9.2
NetK1_2: K1.2 X9.3 | length 7.6
  Bottom Signal Layer w1.5: K1.2 64.725,79.175 X9.3@68.587,83.037
NetK1_3: K1.3 X9.1 | length 21.9
  Bottom Signal Layer w1.5: K1.3 59.925,87.65 73.975,87.65 X9.1
NetK1_5: K1.5 VD12.2 VT2.3 | length 46.7
  Top Signal Layer w0.3: K1.5 40.675,86.775 43.475,83.975 43.475,79.5 46.875,76.1 68.325,76.1 69.4,75.025 74.075,75.025 VT2.3
  Bottom Signal Layer w1: VD12.2 36.525,85.35 37.95,86.775 K1.5
NetR1_1: R1.1 VD3.2 | length 6.4
  Top Signal Layer w0.5: VD3.2 37.65,28.4 v1(37.675,28.375)
  Bottom Signal Layer w1: v1(37.675,28.375) 39,29.7 R1.1
NetR3_1: R3.1 X3.2 | length 4.1
  Top Signal Layer w0.3: R3.1 71.55,60.45 73.83,62.73 X3.2
NetR4_1: R4.1 X3.4 | length 3.3
  Top Signal Layer w0.3: R4.1 68.45,62.7 X3.4
NetR5_1: R5.1 R7.1 VT1.2 | length 8.4
  Top Signal Layer w0.3: R7.1 37.15,31.15 37.75,31.75 ; VT1.2 37.575,31.925 37.75,31.75 ; R5.1 41,33.3 39.1,31.4 38.1,31.4 37.75,31.75
NetR6_1: R6.1 VT1.5 VT1.6 | length 17.9
  Top Signal Layer w0.3: R6.1 35.805,30.4 36.73,29.475 40.4,29.475 40.551,29.626 ; VT1.6 VT1.5 38.875,35.925 39.4,35.4 41.9,35.4 42.7,34.6 42.7,31.775 40.977,30.052 ; 40.552,29.626 40.977,30.051
NetR6_2: R6.2 X4.1 | length 5.8
  Top Signal Layer w0.3: X4.1@29.45,33.75 29.7,33.75 33.05,30.4 R6.2 ; X4.1@29.45,34.175 X4.1
NetR8_2: R8.2 R10.1 X5.1 | length 21.1
  Top Signal Layer w0.2: R10.1 35.9,84 36.7,83.2 36.7,79.85 35.825,78.975 35.825,74.675 36.125,74.375 36.55,74.375 36.75,74.175 R8.2
  Top Signal Layer w0.3: X5.1 30.15,76.2 32.225,76.2 34.825,73.6 R8.2
NetR9_1: R9.1 VT1.4 VT1.7 VT1.8 | length 7.8
  Top Signal Layer w0.2: VT1.7 37.575,38.775 37.8,39 R9.1
  Top Signal Layer w0.3: VT1.8 VT1.7 37.575,36.125 38.875,34.825 VT1.4
NetR9_2: R9.2 R32.1 VT1.3 | length 1.3
  Bottom Signal Layer w0.75: v1(37.7,34.8) 38.923,34.8 R32.1
NetR11_1: R11.1 SPI1.3 | length 7.8
  Top Signal Layer w0.3: R11.1 80.475,71 83.475,68 SPI1.3@86,68
NetR12_1: R12.1 SPI1.4 | length 7.7
  Top Signal Layer w0.3: R12.1@79.4,68.05 80.5,68.05 83.05,65.5 SPI1.4@86,65.5
NetR13_2: R13.2 R16.1 X6.1 | length 16.5
  Top Signal Layer w0.2: R13.2 36.6,62.85 36.6,63.076 35.9,63.776 35.9,68.1 36.9,69.1 R16.1
  Top Signal Layer w0.3: X6.1 31.55,62.4 36.75,62.4 R13.2
NetR14_1: R14.1 SPI1.5 | length 7.5
  Top Signal Layer w0.3: R14.1 80.375,65.2 82.575,63 SPI1.5@86,63
NetR15_1: R15.1 SPI1.6 | length 7.3
  Top Signal Layer w0.3: R15.1 80.525,62.275 82.3,60.5 SPI1.6@86,60.5
NetR18_2: R18.2 R19.1 X7.1 | length 16.7
  Top Signal Layer w0.2: R19.1@36.7,58.75 36.7,58.075 35.85,57.225 35.85,52.826 36.6,52.076 36.6,51.85 R18.2@36.9,51.55
  Top Signal Layer w0.3: X7.1 31.55,51.4 36.75,51.4 R18.2@36.9,51.55 ; R19.1@36.7,58.75 R19.1@36.9,58.95
NetR21_2: R21.2 R22.1 X8.1 | length 16.4
  Top Signal Layer w0.2: R21.2 36.7,40.85 36.7,41.076 36,41.776 36,46.075 36.9,46.975 R22.1
  Top Signal Layer w0.3: X8.1 31.65,40.5 R21.2@36.9,40.5
NetR23_1: R23.1 R24.1 VT2.1 | length 3.8
  Top Signal Layer w0.5: VT2.1 78.275,74.05 78.35,74.125 R24.1@78.35,76
NetR30_2: R30.2 SW2.2 | length 3.4
  Top Signal Layer w0.2: R30.2 78.83,37 SW2.2
NetSPI1_1: SPI1.1 VD7.1 | length 6.8
  Bottom Signal Layer w1.75: VD7.1@79.8,74.45 82.55,74.45 84.025,72.975 SPI1.1
NetVD5_1: VD5.1 X3.1 | length 2.4
  Bottom Signal Layer w1.5: X3.1 76.4,62.97 VD5.1
NetVD6_1: VD6.1 X5.2 | length 3.8
  Bottom Signal Layer w1.75: X5.2 VD6.1
NetVD8_1: VD8.1 X6.2 | length 2.8
  Bottom Signal Layer w1.75: X6.2 VD8.1
NetVD10_1: VD10.1 X7.2 | length 2.8
  Bottom Signal Layer w1.75: X7.2 VD10.1
NetVD11_1: VD11.1 X8.2 | length 2.8
  Bottom Signal Layer w1.75: X8.2 VD11.1@32.25,45.2
PGND: C1.2 C2.2 C3.1 C5.2 C6.2 DA1.3 DA1.5 DA1.6 R2.2 R7.2 R24.2 VD2.2 VD3.1 VD4.2 VT1.1 VT2.2 X1.2 X2.2 X4.2 | length 69.2
  Top Signal Layer w0.7: R7.2@38.754,30.351 v1(40.252,30.351)
  Top Signal Layer w0.75: R7.2@38.676,30.426 38.753,30.35 R7.2@38.754,30.351
  Top Signal Layer w1: VD3.1 39.725,26.65 X1.2
  Ground Layer w1: v1(46.2,69.5) 52.426,69.5 52.8,69.126 ; v1@57.8,59.3 v1(57.8,59.9) 55.5,59.9 52.8,62.6 52.8,69.126 ; 67.075,72.125 63.75,68.8 59.225,68.8 57.9,70.125 v1(57.9,72.8) v1(56.6,72.8) 56.474,72.8 52.8,69.126 ; 67.212,72.262 74.25,79.3 v1(78.275,79.3)
  Bottom Signal Layer w1: 62.775,55.8 62.775,60.9 ; DA1.6@68.065,55.415 DA1.6
  other v1: 57.5,27.45 58.85,27.45 57.5,28.65 58.85,28.65 57.475,29.775 58.8,29.775 57.475,31.075 58.8,31.075 57.475,32.375 58.8,32.375 33.4,32.525 34.425,32.55 51.325,33.7 53.675,33.7 54.975,33.7 56.15,33.7 57.45,33.7 58.75,33.7 52.55,33.725 53.675,34.9 54.975,34.9 56.15,34.9 57.45,34.9 58.75,34.9 51.325,34.925 52.55,34.925 32.3,36.125 49.175,36.7 44.6,37.3 32.3,37.425 44.6,38.5 28.8,38.825 30.7,38.825 32.3,38.825 33.9,38.825 50.85,42.2 50.85,43.3 50.85,44.4 45.425,57.9 45.425,59.025 57.8,59.1 45.1,69.5 45.1,70.55 46.2,70.55 75.375,79.3 76.675,79.3
RS485_A: DA3.2 DD2.13 DD2.18 R30.1 X10.2 X11.2 | length 51.1
  Top Signal Layer w0.2: DD2.18@71.35,37.225 DD2.18@71.35,36.996 ; X10.2 74.8,27.325 67.825,27.325 X11.2 65.625,30.6 69.625,34.6 70.9,34.6 71.8,33.7 72.3,33.7 72.3,36.05 72.175,36.175 72.171,36.175 DD2.18@71.35,36.996 ; R30.1 77.6,39.45 76.35,40.7 66.1,40.7 65,39.6 65,36.875 65.725,36.15 70.504,36.15 DD2.18@71.35,36.996
RS485_B: DA3.1 DD2.15 DD2.17 SW2.1 X10.1 X11.1 | length 68.6
  Top Signal Layer w0.2: DD2.15@67.54,37.225 67.54,39.64 68,40.1 69.5,40.1 70.08,39.52 ; DD2.17@70.08,37.225 70.08,39.5 75.999,39.5 76.7,38.799 76.7,33.775 75.775,32.85 71.876,32.85 71.026,33.7 70.4,33.7 69.725,33.7 68.125,32.1 X11.1 X11.1@68.2,29.525 ; X10.1 79.45,30.125 78.6,30.975 72.1,30.975 70.65,29.525 X11.1@68.2,29.525 ; SW2.1 81.475,32.025 70.7,32.025 X11.1@68.2,29.525
RSGND: C21.1 C22.1 C23.1 C24.1 DA3.3 DD2.11 DD2.14 DD2.16 DD2.20 X10.3 X11.3 | length 11.3
  Top Signal Layer w0.5: DD2.14@66.27,37.225 66.3,37.255 v1(66.3,39.4) ; v1(68.8,39.4) 68.8,37.235 DD2.16@68.81,37.225 ; v1(73.3,33.7) 75.2,33.7 75.9,34.4 75.9,35.275 C23.1 ; DD2.20@73.89,37.225 73.925,37.26 v1(73.925,38.475) C24.1
  other v1: 61.7,31.2 63,31.2 64.3,31.2 65.3,31.8 61.7,32.4 63,32.4 64.3,32.4 66.2,32.4 61.675,33.575 61.675,34.775 61.675,35.8
SGND: C4.1 C7.1 C8.1 C9.1 C10.2 C11.1 C12.2 C13.1 C14.1 C15.1 C16.1 C17.1 C18.2 C19.1 C20.1 C25.1 C26.1 C27.1 C28.1 DA2.2 DA2.4 DD1.8 DD1.23 DD1.35 DD1.47 DD2.1 DD2.3 DD2.9 DD2.10 R2.1 R10.2 R16.2 R19.2 R20.2 R22.2 R25.2 R26.2 R27.2 R28.2 R29.2 R31.2 S1.1 SPI1.2 VD9.2 VD13.2 X3.3 X5.3 X6.3 X7.3 X8.3 | length 37.9
  Top Signal Layer w0.2: v1(51.8,54.7) 52.35,55.25 DD1.47 ; DD1.35 55.25,60.575 56.825,59 56.825,57.075 v1(57.7,56.2) ; DD1.8 58.25,54.407 58.771,54.929 ; DD1.23 62.55,59.75 63.3,60.5 66.3,60.5 66.728,60.072 C8.1
  Top Signal Layer w0.3: C18.2 C18.2@51.1,50.55 ; v1(57.7,56.2) 58.3,56.2 58.8,55.7 58.8,54.9 ; C8.1 67.252,58.5 70.2,58.5 70.7,59 70.7,62.41 X3.3 ; VD9.2 v1(75.5,71.2)
  Top Signal Layer w0.5: C20.1 v1(39.325,58.85) ; C10.2 55.45,67.275 v1(55.45,68.625) ; v1(55.9,49.525) 57.05,50.675 C19.1 ; S1.1 61.675,70.1 v1(63.175,70.1)
  Top Signal Layer w0.6: VD13.2 v1(40.1,64)
  Top Signal Layer w0.7: C16.1 51.35,54.25 v1(51.8,54.7)
  other v1: 41.3,40.1 42.6,40.1 39.5,40.8 39.5,41.875 41.3,42.8 42.5,42.8 84.6,42.8 85.9,42.8 71.375,43.525 72.625,43.525 85.9,44 85.9,45.3 85.9,46.6 85.9,47.8 32.1,48.1 85.9,49.1 60.575,49.375 61.55,49.375 28.6,49.6 30.4,49.6 32.1,49.6 33.6,49.6 35.2,49.6 56.55,50.125 85.9,50.4 85.9,51.6 67.275,51.8 68.625,51.825 85.9,52.9 85.9,54.2 47.45,54.8 48.3,54.8 84.6,55.5 85.9,55.5 32.075,57.95 32.075,59.225 30.45,60.375 28.6,60.4 32.075,60.4 33.65,60.4 35.075,60.4 50.45,62.1 39,64 65.4,67.1 66.6,67.1 31.425,68.8 31.45,70.275 34.9,71.1 38.2,71.2 28.6,71.5 30.3,71.5 72.3,74.1 67.425,74.2 59.2,74.5 67.5,75.2 59.2,75.4 32.1,79.925 32.1,81.175 33.45,81.175 33.425,82.475 33.45,85.275 33.425,86.75
SWCLK: DD1.37 R3.2 | length 40.3
  Top Signal Layer w0.2: v1@49.4,62.778 49.4,61.4 50.55,60.25 DD1.37
  Top Signal Layer w0.3: R3.2 v1(74.1,59.8)
  Ground Layer w0.3: v1@49.4,62.778 49.4,58.3 52.15,55.55 52.152,55.55 52.65,55.052 52.65,55.05 53.7,54 68.3,54 v1(74.1,59.8)
  other v1: 49.402,62.778
SWDIO: DD1.34 R4.2 | length 22.5
  Top Signal Layer w0.2: DD1.34 v1@55.75,63.05
  Top Signal Layer w0.3: v1(55.7,63.1) v1@55.75,63.05 ; R4.2 70,59.85 v1(70,64.4)
  Ground Layer w0.3: v1(55.7,63.1) 56.8,63.1 59.9,66.2 68.2,66.2 v1(70,64.4)
pads on no net: DD1.2 DD1.3 DD1.4 DD1.11 DD1.19 DD1.20 DD1.21 DD1.29 DD1.30 DD1.31 DD1.32 DD1.33 DD1.41 DD1.46 S1.2 S1.4 Z1.

## Polygon pours and split planes (outlines as drawn)
NetDA1_2 on Power Layer "Top Layer-No Net" (solid, pour order 6): 64.975,53.75 41.55,53.75 41.55,61.025 56.025,61.025 56.025,56.75 58,56.75 64.975,56.75
24В on Power Layer "Top Layer-No Net" (solid, pour order 2): 47.825,31.625 41.55,31.625 41.55,47.9 41.55,48.725 41.55,53.075 49.85,53.075 49.85,47.9 59.45,47.9 59.45,44.25 47.825,44.25 47.825,40.8 60.725,40.8 60.725,36.975 47.825,36.975
NetFU1_1 on Power Layer "Top Layer-No Net" (solid, remove dead copper, pour order 0): 60.7,26.25 60.7,36.525 48.2,36.525 48.2,31.3 41.55,31.3 41.55,26.25
5В on Power Layer "Top Layer-No Net" (solid, pour order 8): 43.15,62.725 56.6,62.725 56.6,57.25 64.975,57.25 64.975,66.675 46.95,66.675 46.95,68.05 60.7,68.05 60.7,72.8 61.4,72.8 61.4,70 64.5,70 64.5,73.7 64.5,75.5 62.9,75.5 62.9,73.7 61.3,73.7 61.3,76 74.9,76 74.9,70.9 79.6,70.9 79.6,67.6 79.6,57.25 88.5,57.25 88.5,76.8 88.5,83.25 67.075,83.25 67.075,88.925 32.4,88.925 32.4,82.675 26.525,82.675 26.525,32.15 32.4,32.15 32.4,26.25 41.1,26.25 41.1,70.75 43.15,70.75
3,3В on Power Layer "Top Layer-No Net" (solid, remove dead copper, pour order 48): 65.425,75.5 74.4,75.5 74.4,70.5 79.1,70.5 79.1,56.623 88.5,56.623 88.5,32.325 82.675,32.325 82.675,26.3 65.425,26.3 65.425,48.775 52.3,48.775 52.3,51.075 52.3,53.325 65.425,53.325
5В on Bottom Signal Layer "Top Layer-No Net" (solid, remove dead copper, pour order 192): 34.625,82.3 42.6,82.3 42.6,76.9 34.625,76.9
24В on Bottom Signal Layer "Top Layer-No Net" (solid, remove dead copper, pour order 178): 60.825,53.125 42.425,53.125 42.4,53.15 42.4,49 53.075,49 60.825,49
SGND on Bottom Signal Layer "Top Layer-No Net" (solid, remove dead copper, pour order 124): 58.7,74.25 62.525,74.25 62.525,76.594 58.7,76.594
PGND on Bottom Signal Layer "Top Layer-No Net" (solid, remove dead copper, pour order 122): 62.825,50.2 73.3,50.2 73.3,61.4 56.5,61.4 56.5,58.7 61.5,58.7 61.5,56.5 58.7,56.5 58.7,55.3 62.825,55.3
3,3В on Bottom Signal Layer "Top Layer-No Net" (solid, remove dead copper, pour order 120): 65.1,76.594 65.1,72.7 66.125,72.7 66.125,69.325 72.8,69.325 72.8,73.1 66.675,73.1 66.675,76.594
SGND on Bottom Signal Layer "Top Layer-No Net" (solid, remove dead copper, pour order 118): 67,76.1 67,73.425 72.8,73.425 72.8,76.1
SGND on Bottom Signal Layer "Top Layer-No Net" (solid, remove dead copper, pour order 116): 62.6,63.8 65.975,63.8 65.975,65.7 67.7,65.7 67.7,69.1 65.5,69.1 65.5,72.175 62.754,72.175 62.754,65.7 62.6,65.7
SGND on Bottom Signal Layer "Top Layer-No Net" (solid, remove dead copper, pour order 106): 40.8,43.3 40.8,42.05 34.2,42.05 34.2,39.5 40.8,39.5 43.2,39.5 43.2,43.3
SGND on Bottom Signal Layer "Top Layer-No Net" (solid, remove dead copper, pour order 104): 83.475,58.1 83.475,40.3 86.8,40.3 86.8,58.1
3,3В on Bottom Signal Layer "Top Layer-No Net" (solid, remove dead copper, pour order 62): 67.7,65.2 67.7,61.9 55.2,61.9 55.2,67.875 61.084,67.875 61.084,63.2 66.4,63.2 66.4,65.2
5В on Bottom Signal Layer "Top Layer-No Net" (solid, remove dead copper, pour order 46): 39.7,33.825 39.7,36.8 39.1,36.8 39.1,39 41.5,39 41.5,33.825
5В on Bottom Signal Layer "Top Layer-No Net" (solid, remove dead copper, pour order 40): 78.1,76.1 78.1,64 73.4,64 73.4,76.1
5В on Bottom Signal Layer "Top Layer-No Net" (solid, remove dead copper, pour order 38): 42.4,63.3 42.4,67.875 54.875,67.875 54.875,63.3
5В on Bottom Signal Layer "Top Layer-No Net" (solid, pour order 36): 61.1,58.4 56.5,58.4 56.5,56.9 61.1,56.9
5В on Bottom Signal Layer "Top Layer-No Net" (solid, pour order 34): 60.3,70.1 60.3,72.8 61.2,72.8 61.2,70.1 62.7,70.1 62.7,72.8 64.7,72.8 64.7,76.594 62.75,76.594 62.75,73.85 58.7,73.85 58.7,70.1
NetDA1_2 on Bottom Signal Layer "Top Layer-No Net" (solid, remove dead copper, pour order 30): 42.4,58.175 51.475,58.175 51.475,53.7 56.1,53.7 60.9,53.7 60.9,55 56.1,55 56.1,59.2 54.35,59.2 54.35,61.825 42.4,61.825
24В on Bottom Signal Layer "Top Layer-No Net" (solid, pour order 22): 46.3,41 51.9,41 51.9,35.9 46.3,35.9
5В on Bottom Signal Layer "Top Layer-No Net" (solid, pour order 20): 31.15,71.9 31.15,76.1 41.35,76.1 41.35,71.9
5В on Bottom Signal Layer "Top Layer-No Net" (solid, pour order 16): 34.2,42.9 34.2,47.1 40.5,47.1 40.5,42.9
5В on Bottom Signal Layer "Top Layer-No Net" (solid, pour order 14): 34.2,64.9 34.2,69.1 41.35,69.1 41.35,64.9
5В on Bottom Signal Layer "Top Layer-No Net" (solid, pour order 12): 34.2,53.9 34.2,58.1 41.35,58.1 41.35,53.9
3,3В on Bottom Signal Layer "Top Layer-No Net" (solid, remove dead copper, pour order 58): 73.525,58.4 79.1,58.4 79.1,54.2 73.525,54.2
PGND on Bottom Signal Layer "Top Layer-No Net" (solid, remove dead copper, pour order 98): 43.5,41.2 43.5,35.9 46.075,35.9 46.075,41.2 51.9,41.2 51.9,47.775 43.5,47.775
PGND on Bottom Signal Layer "Top Layer-No Net" (solid, remove dead copper, pour order 100): 51.25,57.9 51.25,53.775 42.4,53.775 42.4,57.9
SGND on Top Signal Layer "Top Layer-No Net" (solid, remove dead copper, pour order 188): 70.95,48.025 70.95,41.85 76.875,41.85 76.875,43.45 74.7,43.45 74.7,44.15 74.7,49.525 73.15,49.525 73.15,46.1 71.725,46.1 71.725,48.025
SGND on Top Signal Layer "Top Layer-No Net" (solid, remove dead copper, pour order 186): 66.9,52.3 66.9,48.5 69.275,48.5 69.275,52.3
PGND on Top Signal Layer "Top Layer-No Net" (solid, remove dead copper, pour order 184): 42.25,57.375 46.125,57.375 46.125,59.575 45.325,60.375 42.25,60.375
PGND on Top Signal Layer "Top Layer-No Net" (solid, remove dead copper, pour order 182): 47.35,69.1 47.35,75.375 42.25,75.375 42.25,69.1 43.1,69.1
5В on Top Signal Layer "Top Layer-No Net" (solid, remove dead copper, pour order 180): 47.35,62.775 42.25,62.775 42.25,67.15 47.35,67.15
24В on Top Signal Layer "Top Layer-No Net" (solid, remove dead copper, pour order 176): 42.25,49.025 42.25,53.75 46.15,53.75 46.15,50.35 44.8,49 44.775,48.975 42.25,48.975 42.25,49.025
24В on Top Signal Layer "Top Layer-No Net" (solid, remove dead copper, pour order 170): 44.425,48.225 44.425,43.475 48.15,43.475 48.15,48.225 44.55,48.225
PGND on Top Signal Layer "Top Layer-No Net" (solid, remove dead copper, pour order 96): 49,26.4 49,31.6 50.9,31.6 50.9,36.2 44.075,36.2 44.075,40.175 52.975,40.175 59.4,40.175 59.4,26.4
24В on Top Signal Layer "Top Layer-No Net" (solid, pour order 24): 54.9,47.7 57.15,47.7 59.4,47.7 59.4,45.45 59.4,43.775 53.35,43.775 53.35,47.7
RSGND on Top Signal Layer "Top Layer-No Net" (solid, remove dead copper, pour order 166): 60.4,40.175 60.4,26.4 64.5,26.4 64.5,30.1 69.4,35 71.9,35 71.9,36.25 71.15,36.25 70.8,35.9 66.5,35.9 66.5,34.6 63,34.6 63,40.175
SGND on Top Signal Layer "Top Layer-No Net" (solid, remove dead copper, pour order 156): 59.7,51.9 59.7,48.925 60.462,48.162 60.462,43.825 64.1,43.825 64.1,48.3 63.35,48.3 63.35,51.9
SGND on Top Signal Layer "Top Layer-No Net" (solid, remove dead copper, pour order 136): 52.7,55.1 52.7,55.4 56.2,55.4 56.2,56.675 59.9,56.675 59.9,54.7 58.4,54.7 58.4,55.6 58.4,55.775 57.025,55.775 57.025,55.1
SGND on Top Signal Layer "Top Layer-No Net" (solid, remove dead copper, pour order 134): 50,62.5 54.3,62.5 54.3,60.8 50.8,60.8 50,61.6
SGND on Top Signal Layer "Top Layer-No Net" (solid, remove dead copper, pour order 132): 74.9,66.7 74.9,64.1 72.4,64.1 72.4,61.9 70.6,61.9 70.6,65.2 73,65.2 73,66.7
PGND on Top Signal Layer "Top Layer-No Net" (solid, remove dead copper, pour order 130): 77.825,75.65 77.825,76.75 78.925,76.75 78.925,75.375 81.175,75.375 81.175,80.2 73.325,80.2 73.325,75.65
SGND on Top Signal Layer "Top Layer-No Net" (solid, remove dead copper, pour order 126): 47.9,48.3 49.1,48.3 49.1,49.8 51.85,49.8 51.85,54.975 51.6,54.975 47.9,51.275
SGND on Top Signal Layer "Top Layer-No Net" (solid, remove dead copper, pour order 114): 61.2,62.6 65.2,62.6 65.2,65.7 67.8,65.7 67.8,68.3 65.1,68.3 61.2,64.4
SGND on Top Signal Layer "Top Layer-No Net" (solid, remove dead copper, pour order 110): 49.95,56.7 49.95,54.3 42.25,54.3 42.25,56.7
3,3В on Top Signal Layer "Top Layer-No Net" (solid, pour order 74): 52.3,51.1 55.9,51.1 55.9,52.3 55,52.3 55,54.3 52.3,54.3
3,3В on Top Signal Layer "Top Layer-No Net" (solid, remove dead copper, pour order 66): 56.4,66 56.4,64.2 50.95,64.2 50.95,63.6 54.2,63.6 54.2,62.9 50,62.9 50,65.5 55.275,65.5 55.275,66
3,3В on Top Signal Layer "Top Layer-No Net" (solid, pour order 56): 63,61 67.8,61 67.8,65.3 65.6,65.3 65.6,62.3 63,62.3 63,61.9 61.1,61.9 61.1,60.1 62.4,60.1 62.4,61 63.1,61
NetR9_2 on Top Signal Layer "Top Layer-No Net" (solid, remove dead copper, pour order 44): 37.125,38.25 37.125,39.9 34.9,39.9 34.9,34 35,34 38,34 38,32.1 38.425,32.1 38.425,34.65 37.412,35.662 36.15,35.662 36.15,38.25
5В on Top Signal Layer "Top Layer-No Net" (solid, remove dead copper, pour order 50): 37.5,54.349 41.3,54.349 41.3,59.6 40.425,59.6 40,59.6 40,58.225 38.25,58.225 37.5,57.475
SGND on Top Signal Layer "Top Layer-No Net" (solid, remove dead copper, pour order 82): 26.2,72.6 35.6,72.6 38.7,72.6 38.7,70.5 35.125,70.5 35.125,68.15 26.2,68.15
SGND on Top Signal Layer "Top Layer-No Net" (solid, remove dead copper, pour order 84): 26.2,79.125 35.425,79.125 35.425,81.65 35.425,88 35.125,88 32.45,88 32.45,82.25 26.2,82.25
SGND on Top Signal Layer "Top Layer-No Net" (solid, remove dead copper, pour order 86): 26.2,57.15 35.125,57.15 35.125,59.7 37.7,59.7 37.7,61.3 26.2,61.3
SGND on Top Signal Layer "Top Layer-No Net" (solid, remove dead copper, pour order 88): 26.2,46.4 35.125,46.4 35.125,48.6 37.925,48.6 37.925,50.6 26.2,50.6
SGND on Top Signal Layer "Top Layer-No Net" (solid, remove dead copper, pour order 90): 38,65.6 40.7,65.6 40.7,63.4 40.6,63.4 40.6,62.3 39.8,62.3 39.8,63.5 38,63.5 38,65
PGND on Top Signal Layer "Top Layer-No Net" (solid, remove dead copper, pour order 92): 26.2,35.5 32.6,35.5 32.6,31.6 36,31.6 37.125,31.6 37.125,33.7 34.525,33.7 34.525,39.9 26.2,39.9
RSGND on Ground Layer "Top Layer-No Net" (solid, remove dead copper, pour order 80): 60.025,26.225 60.025,39.9 80.925,39.9 80.925,26.225
PGND on Ground Layer "Top Layer-No Net" (solid, pour order 78): 59.625,26.225 26.3,26.225 26.3,39.2 43.45,39.2 43.45,74.075 46.725,74.075 46.725,53.775 49.575,53.775 54.7,48.65 59.625,48.65 59.625,40.3
SGND on Ground Layer "Top Layer-No Net" (solid, remove dead copper, pour order 76): 26.3,39.6 26.3,88.65 88.201,88.65 88.201,26.294 81.425,26.23 81.425,40.3 60.025,40.3 60.025,48.9 54.95,48.9 49.775,54.075 47.025,54.075 47.025,74.275 42.95,74.275 42.95,39.6

## Keep-outs
Keep-Out Layer:
  the board outline again, w0.15

## Other copper
Power Layer:
  pour cut-out: 37.725,89.775 37.725,82.375 44.05,82.375 44.05,78.575 88.525,78.575 88.525,89.775
Ground Layer:
  pour cut-out: 37.725,89.775 37.725,76.275 65.75,76.275 65.75,79.8 88.4,79.8 88.4,89.775
Bottom Signal Layer:
  pour cut-out: 43.35,76.175 67.225,76.175 67.225,89.625 67.075,89.775 37.725,89.775 37.725,83.025 43.35,83.025

## Silkscreen, mask and mechanical layers (free items; w line width, h text height)
Top Overlay:
  circle w0.254: c73.35,53.575 r0.875
  lines w0.15: 25.2,43.7 27.15,43.7 ; 25.2,46.7 27.15,46.7 ; 25.2,54.5 27.15,54.5 ; 25.2,57.5 27.15,57.5 ; 25.2,65.5 27.15,65.5 ; 25.2,68.5 27.15,68.5 ; 25.2,76.5 27.15,76.5 ; 25.2,79.5 27.15,79.5 ; 40.025,27.2 40.025,25.2 47.55,25.2 ; 43.675,25.2 43.675,27.2 ; 46.025,27.2 46.25,27.2 ; 47.575,25.2 47.575,27.175 ; 49.35,25.2 49.35,27.2 ; 49.375,25.2 56.9,25.2 56.9,27.175 ; 53.025,25.2 53.025,27.2 ; 55.375,27.2 55.6,27.2 ; 60.6,25.275 60.6,27.275 ; 60.625,25.275 70.65,25.275 70.65,27.275 ; 64.875,25.275 64.875,27.275 ; 67.75,25.3 67.75,27.225 ; 67.83,62.07 67.83,60.725 77.23,60.725 77.23,62.07 ; 70,60.75 70,62.07 ; 71.925,25.2 71.925,27.2 ; 71.95,25.2 81.975,25.2 81.975,27.2 ; 72.53,60.775 72.53,62.07 ; 75,60.75 75,62 ; 76.2,25.2 76.2,27.2 ; 79.075,25.225 79.075,27.15 ; 40.25,33.75 40.25,33.75 ; 48.75,33.75 48.75,33.75 ; 68.625,27.275 68.625,27.275 ; 79.95,27.2 79.95,27.2
  lines w0.2: 25.2,35.725 27.15,35.725 ; 27.15,31.925 25.2,31.925 25.2,39.425 27.15,39.425 ; 30.85,40.2 35,40.2 ; 30.85,50.2 35,50.2 ; 30.85,51 35,51 ; 30.85,61 35,61 ; 30.85,62 35,62 ; 30.85,72 35,72 ; 30.85,73 35,73 ; 30.85,83 35,83 ; 32.85,31.925 35.75,31.925 35.75,39.425 32.85,39.425 ; 77,45 79.49,45 ; 77,47.75 79.49,47.75 ; 77,50.5 79.49,50.5 ; 77,53.25 79.49,53.25 ; 78.65,34.05 89.8,34.05 89.8,36.3 ; 78.65,34.1 78.65,36.3 ; 79.49,42 77,42 77,56.25 ; 79.49,56.25 77,56.25 ; 87.575,57.975 89.8,57.975 ; 87.575,75.475 89.8,75.475 89.8,58 ; 88.25,66.5 89.8,66.5 ; 88.25,69.75 89.8,69.75 ; 88.25,73.75 89.8,73.75 ; 88.275,60.75 89.8,60.75 ; 88.275,63 89.8,63 ; 77,56.25 77,56.25 ; 25.2,40.2 35.75,40.2 35.75,50.2 25.2,50.2 25.2,40.2 ; 25.2,51 25.2,61 35.75,61 35.75,51 25.2,51 ; 25.2,62 25.2,72 35.75,72 35.75,62 25.2,62 ; 25.2,73 25.2,83 35.75,83 35.75,73 25.2,73
  lines w0.25: 65.875,87.394 65.875,89.8 81.375,89.8 81.375,87.394 ; 71.375,87.394 71.375,89.8 ; 72.35,57.125 72.35,54.575 73.35,53.575 74.225,54.45 74.225,57.15 ; 74.225,53.475 74.225,54.925 ; 76.375,87.394 76.375,89.8 ; 65.225,51.3 65.225,57.475 75.9,57.475 75.9,51.3 65.225,51.3
  lines w0.254: 74.225,57.15 cw(c74.02,55.861) 74.401,54.613
  text "NC" at 74.675,89.3 h2 r180
  text "NO" at 69.875,89.25 h2 r180
  text "BASE" at 80.825,89.25 h2 r180
  text "SGND" at 25.7,82.7 h1.5 r270
  text "DIN1" at 33.5,80.5 h3 r270
  text "5B" at 25.7,78.5 h1.5 r270
  text "DIN" at 25.7,75.5 h1.5 r270
  text "5B" at 89.475,74.05 h1.5 r90
  text "SGND" at 25.7,71.7 h1.5 r270
  text "SGND" at 89.5,70.3 h1.5 r90
  text "DIN2" at 33.5,69.5 h3 r270
  text "5B" at 25.7,67.5 h1.5 r270
  text "MOSI" at 89.475,66.825 h1.5 r90
  text "DIN" at 25.7,64.6 h1.5 r270
  text "MISO" at 89.5,63.45 h1.5 r90
  text "CS" at 89.5,61.175 h1.5 r90
  text "DIO" at 68.275,60.875 h1.2
  text "GND" at 70.4,60.85 h1.2
  text "CLK" at 72.9,60.85 h1.2
  text "3,3В" at 75.3,60.85 h1.2
  text "SGND" at 25.7,60.8 h1.5 r270
  text "DIN3" at 33.5,58.5 h3 r270
  text "CLK" at 89.525,58.325 h1.5 r90
  text "5B" at 25.7,56.5 h1.5 r270
  text "ADR4" at 78.5,53.7 h1 r90
  text "DIN" at 25.7,53.5 h1.5 r270
  text "Gavrusha" at 65.625,53.1 h2
  text "v1.0 04.2017" at 65.725,52.3 h1
  text "V.P." at 72.475,51.525 h1.52
  text "ADR3" at 78.5,51 h1 r90
  text "SGND" at 25.7,50 h1.5 r270
  text "ADR2" at 78.5,48.25 h1 r90
  text "DIN4" at 33.5,47.45 h3 r270
  text "5B" at 25.7,45.7 h1.5 r270
  text "ADR1" at 78.5,45.5 h1 r90
  text "DIN" at 25.6,42.7 h1.5 r270
  text "ADR0" at 78.5,42.525 h1 r90
  text "PGND" at 25.7,39.025 h1.5 r270
  text "DOUT" at 33.25,38.425 h3 r270
  text "TERMINATOR" at 89.2,35.8 h2 r180
  text "DOUT" at 25.7,35.225 h1.5 r270
  text "A" at 66,25.85 h1.5
  text "B" at 68.9,25.85 h1.5
  text "RSGND" at 60.875,25.825 h1.5
  text "A" at 77.325,25.775 h1.5
  text "B" at 80.225,25.775 h1.5
  text "PGND" at 40.3,25.75 h1.5
  text "24B" at 44.575,25.75 h1.5
  text "PGND" at 49.65,25.75 h1.5
  text "24B" at 53.925,25.75 h1.5
  text "RSGND" at 72.2,25.75 h1.5
Bottom Overlay:
  circle w0.254: c69.225,35.125 r0.875
  lines w0.2: 78,75.5 78,75.5
  lines w0.25: 68.35,35.025 68.35,36.475 ; 68.35,38.975 68.35,36 69.225,35.125 70.225,36.125 70.225,38.95 ; 66.675,32.7 66.7,32.675 77.35,32.675 77.35,39.5 66.675,39.5 66.675,32.7
  lines w0.254: 68.174,36.438 cw(c68.555,37.686) 68.35,38.975
  text "Gavrusha" at 76.95,34.65 h2
  text "v1.0 04.2017" at 76.85,33.725 h1
  text "V.P." at 70.1,33 h1.52